# EAGLE board SGP40 Breakout-Panel (EAGLE 9.6.2), part 1 of 4
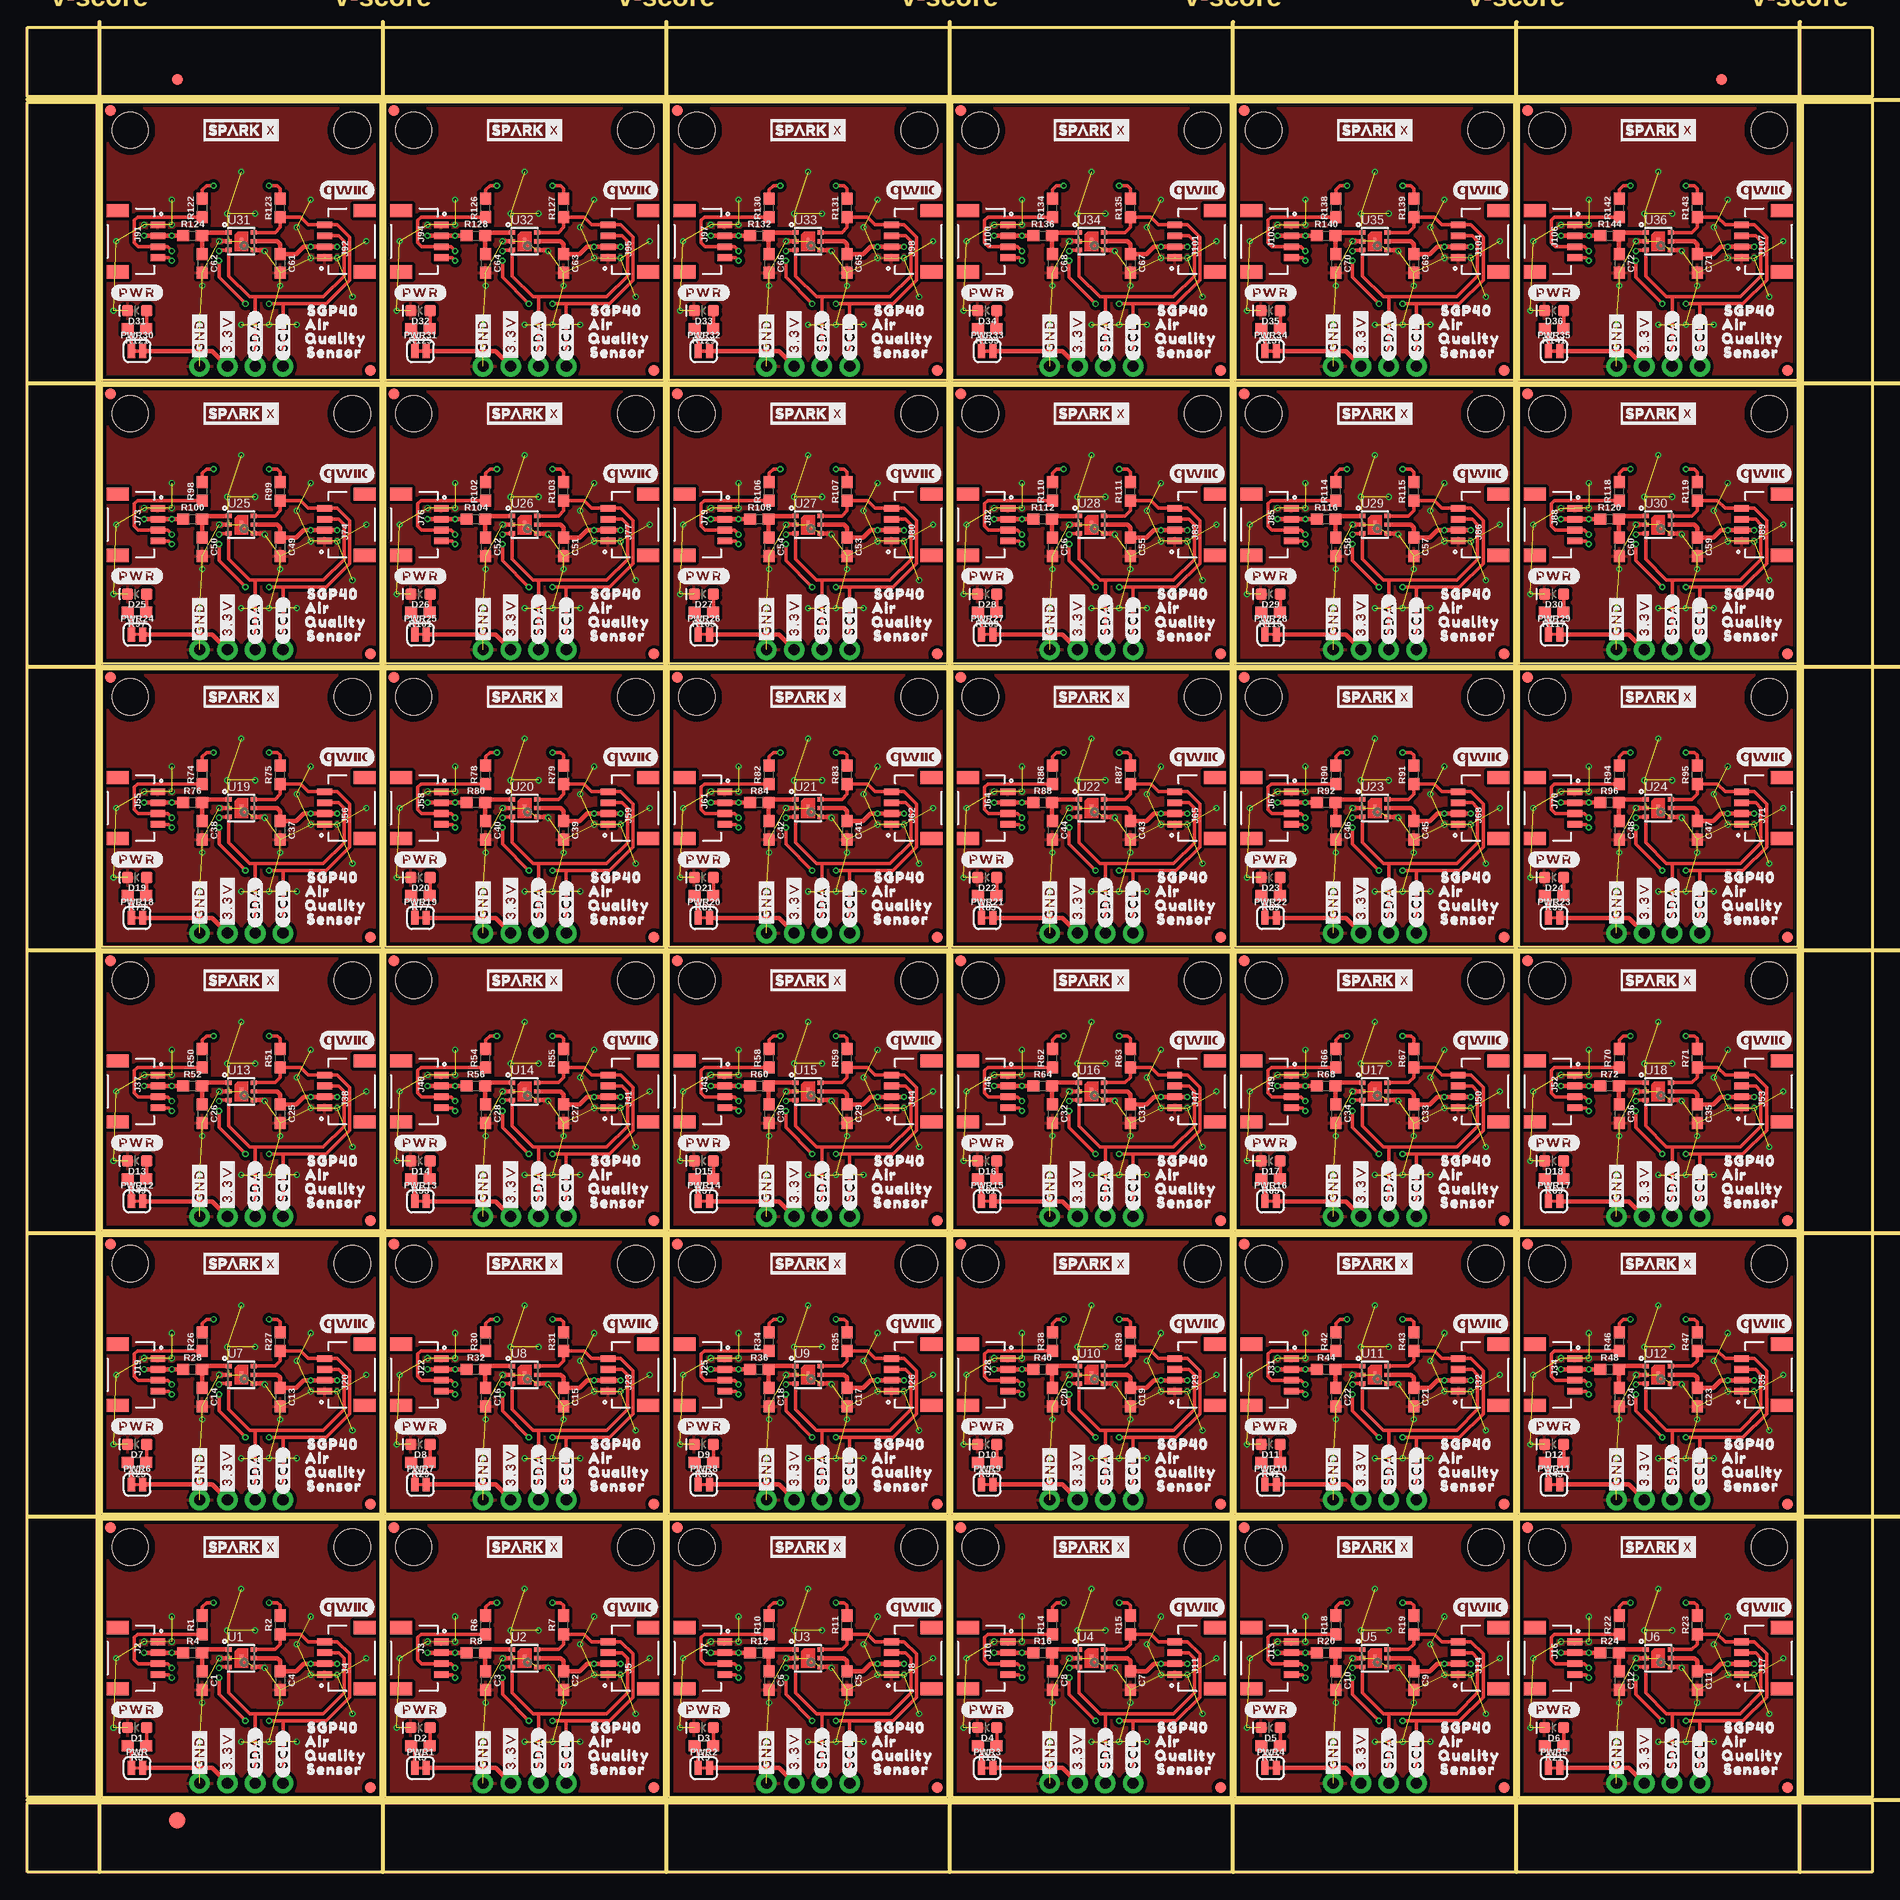
[diagram p0: board, top side]
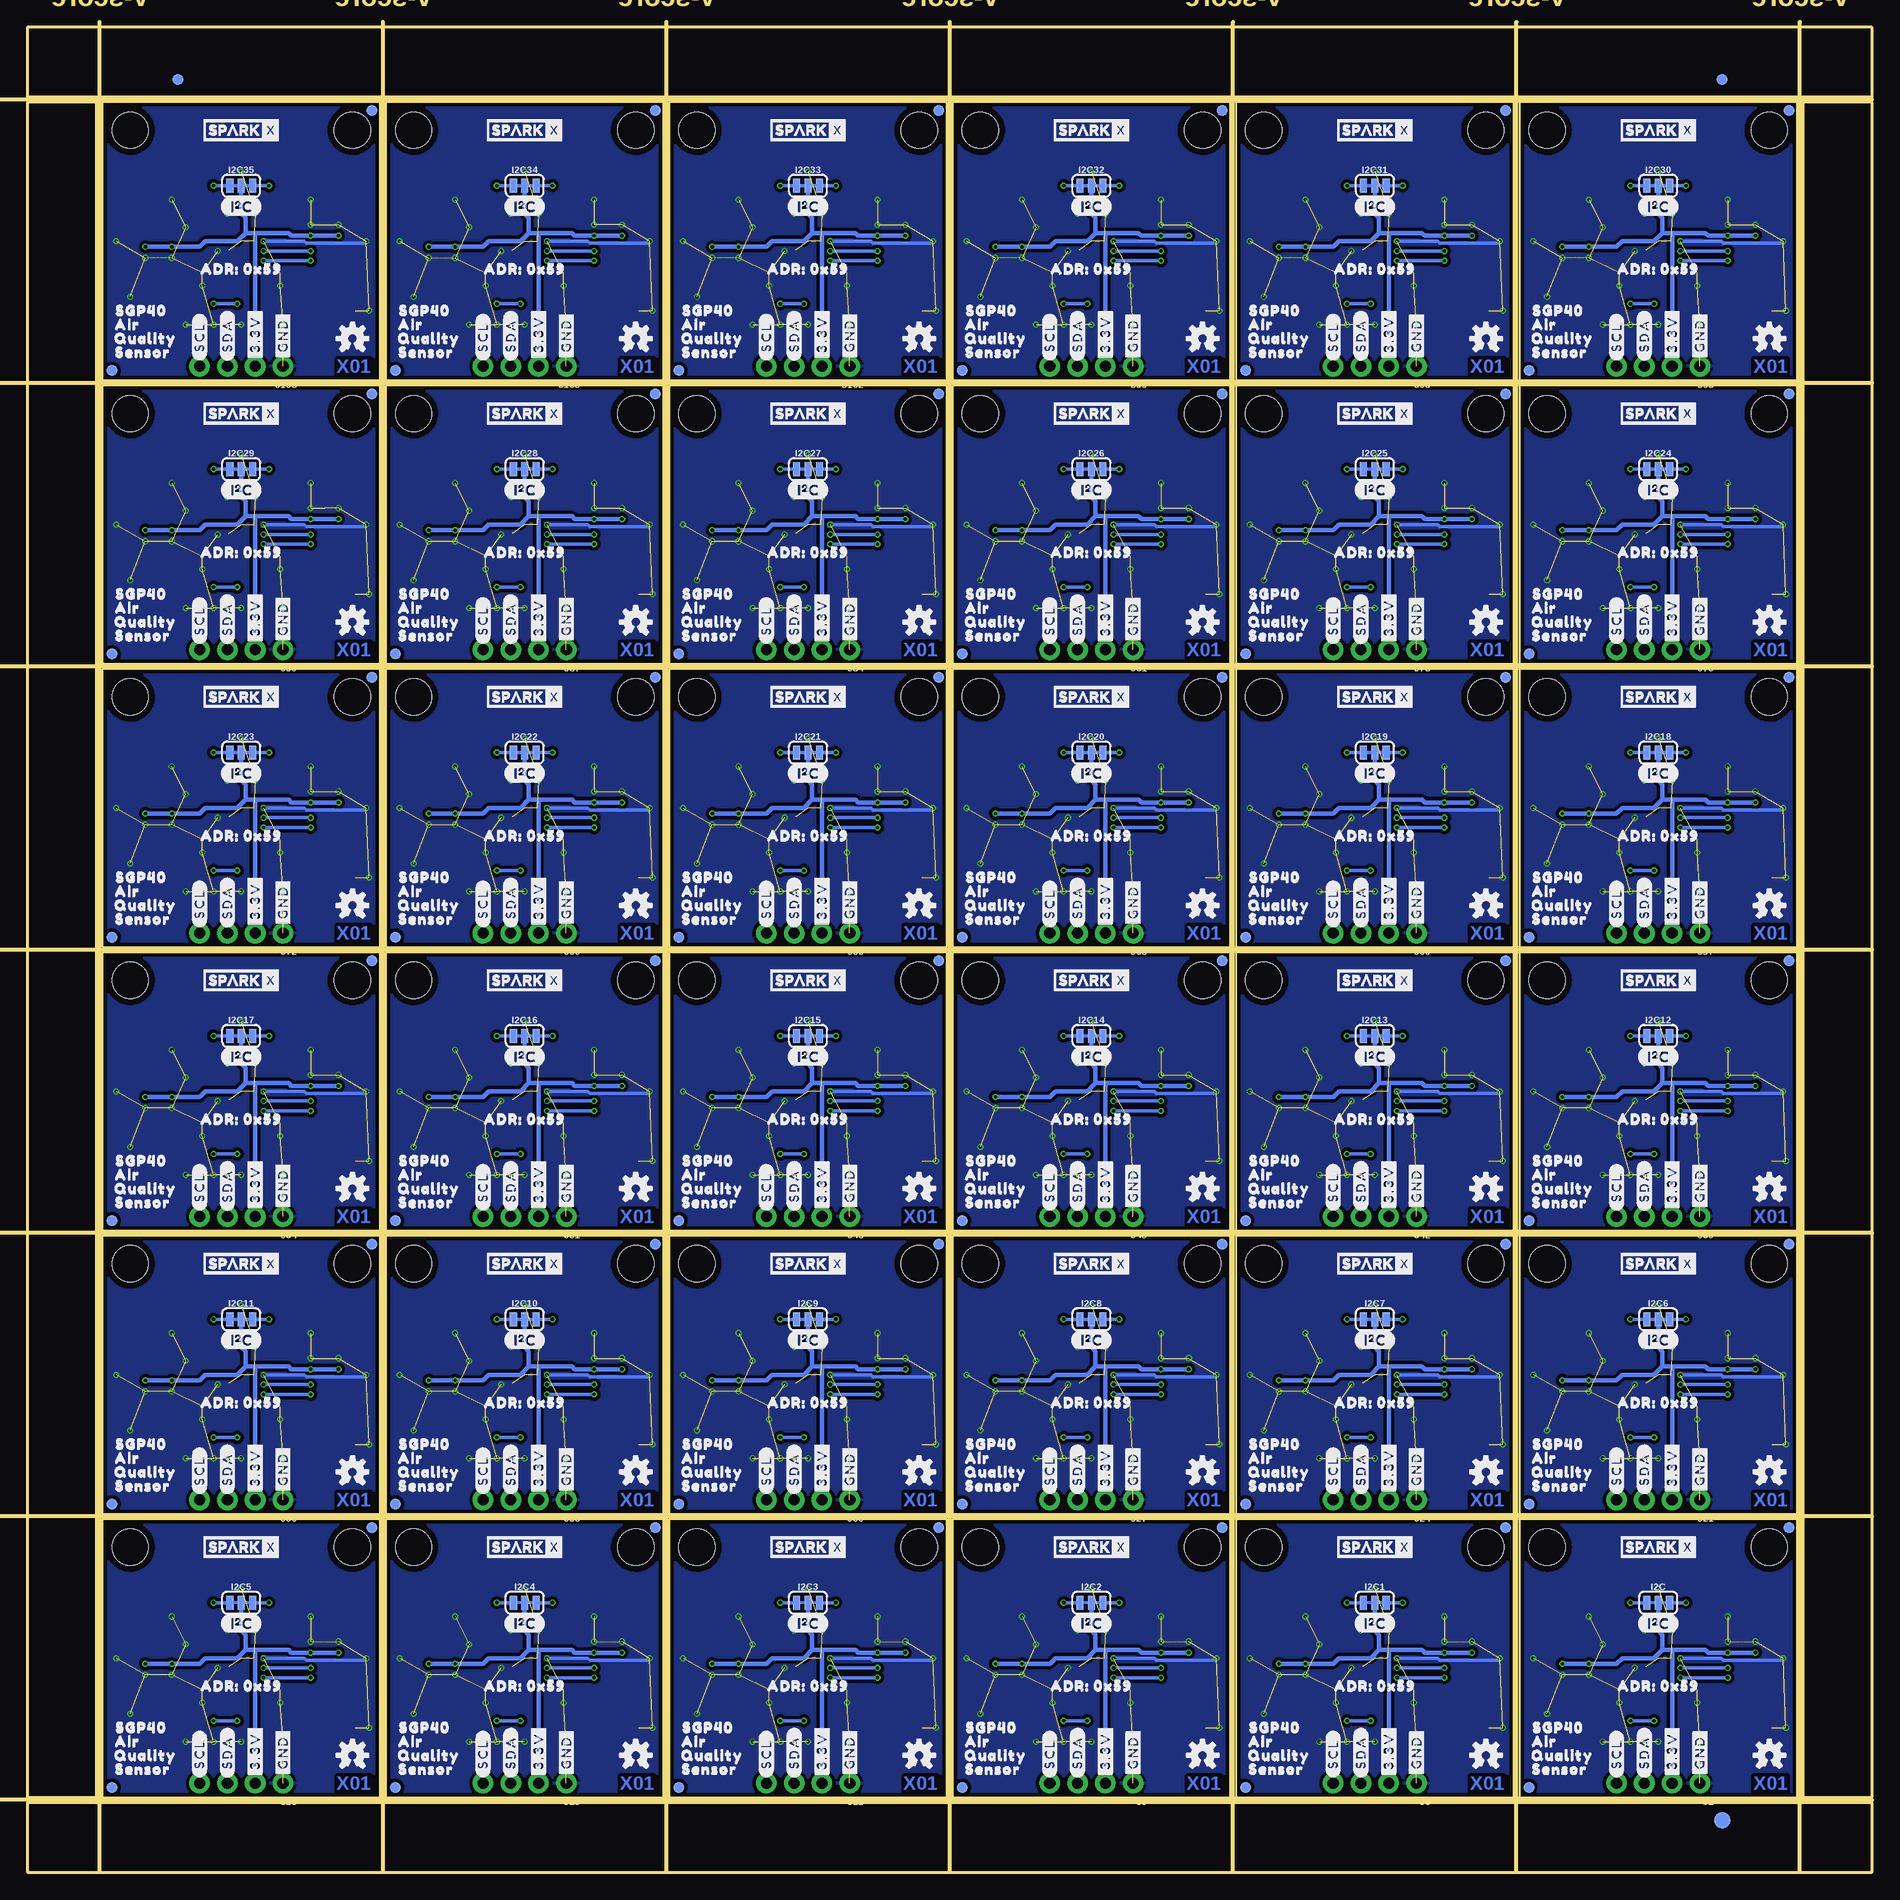
[diagram p1: board, bottom side, seen from below]

Size 168.66 x 168.66 mm. Coordinates in mm from the lower left corner, seen from the top.
Outline: 6.86,6.86 6.86,32.26 32.26,32.26 32.26,6.86 6.86,6.86
Outline: 32.77,6.86 32.77,32.26 58.17,32.26 58.17,6.86 32.77,6.86
Outline: 58.67,6.86 58.67,32.26 84.07,32.26 84.07,6.86 58.67,6.86
Outline: 84.58,6.86 84.58,32.26 109.98,32.26 109.98,6.86 84.58,6.86
Outline: 110.49,6.86 110.49,32.26 135.89,32.26 135.89,6.86 110.49,6.86
Outline: 136.4,6.86 136.4,32.26 161.8,32.26 161.8,6.86 136.4,6.86
Outline: 6.86,32.77 6.86,58.17 32.26,58.17 32.26,32.77 6.86,32.77
Outline: 32.77,32.77 32.77,58.17 58.17,58.17 58.17,32.77 32.77,32.77
Outline: 58.67,32.77 58.67,58.17 84.07,58.17 84.07,32.77 58.67,32.77
Outline: 84.58,32.77 84.58,58.17 109.98,58.17 109.98,32.77 84.58,32.77
Outline: 110.49,32.77 110.49,58.17 135.89,58.17 135.89,32.77 110.49,32.77
Outline: 136.4,32.77 136.4,58.17 161.8,58.17 161.8,32.77 136.4,32.77
Outline: 6.86,58.67 6.86,84.07 32.26,84.07 32.26,58.67 6.86,58.67
Outline: 32.77,58.67 32.77,84.07 58.17,84.07 58.17,58.67 32.77,58.67
Outline: 58.67,58.67 58.67,84.07 84.07,84.07 84.07,58.67 58.67,58.67
Outline: 84.58,58.67 84.58,84.07 109.98,84.07 109.98,58.67 84.58,58.67
Outline: 110.49,58.67 110.49,84.07 135.89,84.07 135.89,58.67 110.49,58.67
Outline: 136.4,58.67 136.4,84.07 161.8,84.07 161.8,58.67 136.4,58.67
Outline: 6.86,84.58 6.86,109.98 32.26,109.98 32.26,84.58 6.86,84.58
Outline: 32.77,84.58 32.77,109.98 58.17,109.98 58.17,84.58 32.77,84.58
Outline: 58.67,84.58 58.67,109.98 84.07,109.98 84.07,84.58 58.67,84.58
Outline: 84.58,84.58 84.58,109.98 109.98,109.98 109.98,84.58 84.58,84.58
Outline: 110.49,84.58 110.49,109.98 135.89,109.98 135.89,84.58 110.49,84.58
Outline: 136.4,84.58 136.4,109.98 161.8,109.98 161.8,84.58 136.4,84.58
Outline: 6.86,110.49 6.86,135.89 32.26,135.89 32.26,110.49 6.86,110.49
Outline: 32.77,110.49 32.77,135.89 58.17,135.89 58.17,110.49 32.77,110.49
Outline: 58.67,110.49 58.67,135.89 84.07,135.89 84.07,110.49 58.67,110.49
Outline: 84.58,110.49 84.58,135.89 109.98,135.89 109.98,110.49 84.58,110.49
Outline: 110.49,110.49 110.49,135.89 135.89,135.89 135.89,110.49 110.49,110.49
Outline: 136.4,110.49 136.4,135.89 161.8,135.89 161.8,110.49 136.4,110.49
Outline: 6.86,136.4 6.86,161.8 32.26,161.8 32.26,136.4 6.86,136.4
Outline: 32.77,136.4 32.77,161.8 58.17,161.8 58.17,136.4 32.77,136.4
Outline: 58.67,136.4 58.67,161.8 84.07,161.8 84.07,136.4 58.67,136.4
Outline: 84.58,136.4 84.58,161.8 109.98,161.8 109.98,136.4 84.58,136.4
Outline: 110.49,136.4 110.49,161.8 135.89,161.8 135.89,136.4 110.49,136.4
Outline: 136.4,136.4 136.4,161.8 161.8,161.8 161.8,136.4 136.4,136.4
Outline: 0,6.35 168.66,6.35 168.66,0 0,0 0,6.35
Outline: 162.31,161.8 168.66,161.8 168.66,6.86 162.31,6.86 162.31,161.8
Outline: 0,168.66 168.66,168.66 168.66,162.31 0,162.31 0,168.66
Outline: 0,161.8 6.35,161.8 6.35,6.86 0,6.86 0,161.8
Copper layers (1*16): Top 0.035mm / dielectric 1.5mm / Bottom 0.035mm
Design rules "SGP40 Breakout": minimum track width 5mil, minimum drill 0.3mm, track to track 5mil, track to pad 5mil, pad to pad 5mil, via to via 5mil, smd to smd 5mil, copper to edge 7mil, drill to drill 7mil, minimum pad ring 5mil, minimum via ring 5mil, stop-mask expansion 2.5mil, vias tented up to drill 25mil, thermal gap 10mil
Milling: 14 lines

## Footprints (pad centres in the part's own frame; a part is rotated, then mirrored left to right if it is on the bottom)
0603 = smd 1.1 x 1: 1 -0.85,0; 2 0.85,0
LED-0603 = smd 1 x 1: A -0.877,0; C 0.877,0
FIDUCIAL-1X2 = smd 1 x 1: 1 0,0
FIDUCIAL-1.5X3 = smd 1.5 x 1.5: 1 0,0
SMT-JUMPER_3_2-NC_TRACE_SILK = smd 0.66 x 1.27: 1 -1.041,0; 2 0,0; 3 1.041,0
1X04_NO_SILK = drill 1.016 pad 1.88: 1 0,0; 2 2.54,0; 3 5.08,0; 4 7.62,0
JST04_1MM_RA = smd 0.6 x 1.35: 1 -1.5,0; 2 -0.5,0; 3 0.5,0; 4 1.5,0 | smd 1.2 x 2: NC1 2.8,-3.675; NC2 -2.8,-3.675
STAND-OFF = hole 3.302: 0,0
SMT-JUMPER_2_NC_TRACE_SILK = smd 0.66 x 1.27: 1 -0.521,0; 2 0.521,0
SGP40 = smd 0.55 x 0.4: 1 -1.15,0.8; 2 -1.15,0; 3 -1.15,-0.8; 4 1.15,-0.8; 5 1.15,0; 6 1.15,0.8 | smd 0.305 x 0.61: DIEPAD 0,0

## Placement (x,y rotation side)
C1  1.0uF  [0603]  16,17.53 270 top
C2  1.0uF  [0603]  49.02,17.53 270 top
C3  1.0uF  [0603]  41.91,17.53 270 top
C4  1.0uF  [0603]  23.11,17.53 270 top
C5  1.0uF  [0603]  74.93,17.53 270 top
C6  1.0uF  [0603]  67.82,17.53 270 top
C7  1.0uF  [0603]  100.84,17.53 270 top
C8  1.0uF  [0603]  93.73,17.53 270 top
C9  1.0uF  [0603]  126.75,17.53 270 top
C10  1.0uF  [0603]  119.63,17.53 270 top
C11  1.0uF  [0603]  152.65,17.53 270 top
C12  1.0uF  [0603]  145.54,17.53 270 top
C13  1.0uF  [0603]  23.11,43.43 270 top
C14  1.0uF  [0603]  16,43.43 270 top
C15  1.0uF  [0603]  49.02,43.43 270 top
C16  1.0uF  [0603]  41.91,43.43 270 top
C17  1.0uF  [0603]  74.93,43.43 270 top
C18  1.0uF  [0603]  67.82,43.43 270 top
C19  1.0uF  [0603]  100.84,43.43 270 top
C20  1.0uF  [0603]  93.73,43.43 270 top
C21  1.0uF  [0603]  126.75,43.43 270 top
C22  1.0uF  [0603]  119.63,43.43 270 top
C23  1.0uF  [0603]  152.65,43.43 270 top
C24  1.0uF  [0603]  145.54,43.43 270 top
C25  1.0uF  [0603]  23.11,69.34 270 top
C26  1.0uF  [0603]  16,69.34 270 top
C27  1.0uF  [0603]  49.02,69.34 270 top
C28  1.0uF  [0603]  41.91,69.34 270 top
C29  1.0uF  [0603]  74.93,69.34 270 top
C30  1.0uF  [0603]  67.82,69.34 270 top
C31  1.0uF  [0603]  100.84,69.34 270 top
C32  1.0uF  [0603]  93.73,69.34 270 top
C33  1.0uF  [0603]  126.75,69.34 270 top
C34  1.0uF  [0603]  119.63,69.34 270 top
C35  1.0uF  [0603]  152.65,69.34 270 top
C36  1.0uF  [0603]  145.54,69.34 270 top
C37  1.0uF  [0603]  23.11,95.25 270 top
C38  1.0uF  [0603]  16,95.25 270 top
C39  1.0uF  [0603]  49.02,95.25 270 top
C40  1.0uF  [0603]  41.91,95.25 270 top
C41  1.0uF  [0603]  74.93,95.25 270 top
C42  1.0uF  [0603]  67.82,95.25 270 top
C43  1.0uF  [0603]  100.84,95.25 270 top
C44  1.0uF  [0603]  93.73,95.25 270 top
C45  1.0uF  [0603]  126.75,95.25 270 top
C46  1.0uF  [0603]  119.63,95.25 270 top
C47  1.0uF  [0603]  152.65,95.25 270 top
C48  1.0uF  [0603]  145.54,95.25 270 top
C49  1.0uF  [0603]  23.11,121.16 270 top
C50  1.0uF  [0603]  16,121.16 270 top
C51  1.0uF  [0603]  49.02,121.16 270 top
C52  1.0uF  [0603]  41.91,121.16 270 top
C53  1.0uF  [0603]  74.93,121.16 270 top
C54  1.0uF  [0603]  67.82,121.16 270 top
C55  1.0uF  [0603]  100.84,121.16 270 top
C56  1.0uF  [0603]  93.73,121.16 270 top
C57  1.0uF  [0603]  126.75,121.16 270 top
C58  1.0uF  [0603]  119.63,121.16 270 top
C59  1.0uF  [0603]  152.65,121.16 270 top
C60  1.0uF  [0603]  145.54,121.16 270 top
C61  1.0uF  [0603]  23.11,147.07 270 top
C62  1.0uF  [0603]  16,147.07 270 top
C63  1.0uF  [0603]  49.02,147.07 270 top
C64  1.0uF  [0603]  41.91,147.07 270 top
C65  1.0uF  [0603]  74.93,147.07 270 top
C66  1.0uF  [0603]  67.82,147.07 270 top
C67  1.0uF  [0603]  100.84,147.07 270 top
C68  1.0uF  [0603]  93.73,147.07 270 top
C69  1.0uF  [0603]  126.75,147.07 270 top
C70  1.0uF  [0603]  119.63,147.07 270 top
C71  1.0uF  [0603]  152.65,147.07 270 top
C72  1.0uF  [0603]  145.54,147.07 270 top
D1  RED  [LED-0603]  10.03,13.21 180 top
D2  RED  [LED-0603]  35.94,13.21 180 top
D3  RED  [LED-0603]  61.85,13.21 180 top
D4  RED  [LED-0603]  87.76,13.21 180 top
D5  RED  [LED-0603]  113.67,13.21 180 top
D6  RED  [LED-0603]  139.57,13.21 180 top
D7  RED  [LED-0603]  10.03,39.12 180 top
D8  RED  [LED-0603]  35.94,39.12 180 top
D9  RED  [LED-0603]  61.85,39.12 180 top
D10  RED  [LED-0603]  87.76,39.12 180 top
D11  RED  [LED-0603]  113.67,39.12 180 top
D12  RED  [LED-0603]  139.57,39.12 180 top
D13  RED  [LED-0603]  10.03,65.02 180 top
D14  RED  [LED-0603]  35.94,65.02 180 top
D15  RED  [LED-0603]  61.85,65.02 180 top
D16  RED  [LED-0603]  87.76,65.02 180 top
D17  RED  [LED-0603]  113.67,65.02 180 top
D18  RED  [LED-0603]  139.57,65.02 180 top
D19  RED  [LED-0603]  10.03,90.93 180 top
D20  RED  [LED-0603]  35.94,90.93 180 top
D21  RED  [LED-0603]  61.85,90.93 180 top
D22  RED  [LED-0603]  87.76,90.93 180 top
D23  RED  [LED-0603]  113.67,90.93 180 top
D24  RED  [LED-0603]  139.57,90.93 180 top
D25  RED  [LED-0603]  10.03,116.84 180 top
D26  RED  [LED-0603]  35.94,116.84 180 top
D27  RED  [LED-0603]  61.85,116.84 180 top
D28  RED  [LED-0603]  87.76,116.84 180 top
D29  RED  [LED-0603]  113.67,116.84 180 top
D30  RED  [LED-0603]  139.57,116.84 180 top
D31  RED  [LED-0603]  10.03,142.75 180 top
D32  RED  [LED-0603]  35.94,142.75 180 top
D33  RED  [LED-0603]  61.85,142.75 180 top
D34  RED  [LED-0603]  87.76,142.75 180 top
D35  RED  [LED-0603]  113.67,142.75 180 top
D36  RED  [LED-0603]  139.57,142.75 180 top
E$1  [FIDUCIAL-1X2]  13.72,163.89 0 top
E$2  [FIDUCIAL-1X2]  13.72,163.89 0 bottom
E$3  [FIDUCIAL-1X2]  154.88,163.89 0 top
E$4  [FIDUCIAL-1X2]  154.88,163.89 0 bottom
E$5  [FIDUCIAL-1.5X3]  13.72,4.76 0 top
E$6  [FIDUCIAL-1.5X3]  13.72,4.76 0 bottom
I2C  JUMPER-SMT_3_2-NC_TRACE_SILK  [SMT-JUMPER_3_2-NC_TRACE_SILK]  19.56,24.64 0 bottom
I2C1  JUMPER-SMT_3_2-NC_TRACE_SILK  [SMT-JUMPER_3_2-NC_TRACE_SILK]  45.47,24.64 0 bottom
I2C2  JUMPER-SMT_3_2-NC_TRACE_SILK  [SMT-JUMPER_3_2-NC_TRACE_SILK]  71.37,24.64 0 bottom
I2C3  JUMPER-SMT_3_2-NC_TRACE_SILK  [SMT-JUMPER_3_2-NC_TRACE_SILK]  97.28,24.64 0 bottom
I2C4  JUMPER-SMT_3_2-NC_TRACE_SILK  [SMT-JUMPER_3_2-NC_TRACE_SILK]  123.19,24.64 0 bottom
I2C5  JUMPER-SMT_3_2-NC_TRACE_SILK  [SMT-JUMPER_3_2-NC_TRACE_SILK]  149.1,24.64 0 bottom
I2C6  JUMPER-SMT_3_2-NC_TRACE_SILK  [SMT-JUMPER_3_2-NC_TRACE_SILK]  19.56,50.55 0 bottom
I2C7  JUMPER-SMT_3_2-NC_TRACE_SILK  [SMT-JUMPER_3_2-NC_TRACE_SILK]  45.47,50.55 0 bottom
I2C8  JUMPER-SMT_3_2-NC_TRACE_SILK  [SMT-JUMPER_3_2-NC_TRACE_SILK]  71.37,50.55 0 bottom
I2C9  JUMPER-SMT_3_2-NC_TRACE_SILK  [SMT-JUMPER_3_2-NC_TRACE_SILK]  97.28,50.55 0 bottom
I2C10  JUMPER-SMT_3_2-NC_TRACE_SILK  [SMT-JUMPER_3_2-NC_TRACE_SILK]  123.19,50.55 0 bottom
I2C11  JUMPER-SMT_3_2-NC_TRACE_SILK  [SMT-JUMPER_3_2-NC_TRACE_SILK]  149.1,50.55 0 bottom
I2C12  JUMPER-SMT_3_2-NC_TRACE_SILK  [SMT-JUMPER_3_2-NC_TRACE_SILK]  19.56,76.45 0 bottom
I2C13  JUMPER-SMT_3_2-NC_TRACE_SILK  [SMT-JUMPER_3_2-NC_TRACE_SILK]  45.47,76.45 0 bottom
I2C14  JUMPER-SMT_3_2-NC_TRACE_SILK  [SMT-JUMPER_3_2-NC_TRACE_SILK]  71.37,76.45 0 bottom
I2C15  JUMPER-SMT_3_2-NC_TRACE_SILK  [SMT-JUMPER_3_2-NC_TRACE_SILK]  97.28,76.45 0 bottom
I2C16  JUMPER-SMT_3_2-NC_TRACE_SILK  [SMT-JUMPER_3_2-NC_TRACE_SILK]  123.19,76.45 0 bottom
I2C17  JUMPER-SMT_3_2-NC_TRACE_SILK  [SMT-JUMPER_3_2-NC_TRACE_SILK]  149.1,76.45 0 bottom
I2C18  JUMPER-SMT_3_2-NC_TRACE_SILK  [SMT-JUMPER_3_2-NC_TRACE_SILK]  19.56,102.36 0 bottom
I2C19  JUMPER-SMT_3_2-NC_TRACE_SILK  [SMT-JUMPER_3_2-NC_TRACE_SILK]  45.47,102.36 0 bottom
I2C20  JUMPER-SMT_3_2-NC_TRACE_SILK  [SMT-JUMPER_3_2-NC_TRACE_SILK]  71.37,102.36 0 bottom
I2C21  JUMPER-SMT_3_2-NC_TRACE_SILK  [SMT-JUMPER_3_2-NC_TRACE_SILK]  97.28,102.36 0 bottom
I2C22  JUMPER-SMT_3_2-NC_TRACE_SILK  [SMT-JUMPER_3_2-NC_TRACE_SILK]  123.19,102.36 0 bottom
I2C23  JUMPER-SMT_3_2-NC_TRACE_SILK  [SMT-JUMPER_3_2-NC_TRACE_SILK]  149.1,102.36 0 bottom
I2C24  JUMPER-SMT_3_2-NC_TRACE_SILK  [SMT-JUMPER_3_2-NC_TRACE_SILK]  19.56,128.27 0 bottom
I2C25  JUMPER-SMT_3_2-NC_TRACE_SILK  [SMT-JUMPER_3_2-NC_TRACE_SILK]  45.47,128.27 0 bottom
I2C26  JUMPER-SMT_3_2-NC_TRACE_SILK  [SMT-JUMPER_3_2-NC_TRACE_SILK]  71.37,128.27 0 bottom
I2C27  JUMPER-SMT_3_2-NC_TRACE_SILK  [SMT-JUMPER_3_2-NC_TRACE_SILK]  97.28,128.27 0 bottom
I2C28  JUMPER-SMT_3_2-NC_TRACE_SILK  [SMT-JUMPER_3_2-NC_TRACE_SILK]  123.19,128.27 0 bottom
I2C29  JUMPER-SMT_3_2-NC_TRACE_SILK  [SMT-JUMPER_3_2-NC_TRACE_SILK]  149.1,128.27 0 bottom
I2C30  JUMPER-SMT_3_2-NC_TRACE_SILK  [SMT-JUMPER_3_2-NC_TRACE_SILK]  19.56,154.18 0 bottom
I2C31  JUMPER-SMT_3_2-NC_TRACE_SILK  [SMT-JUMPER_3_2-NC_TRACE_SILK]  45.47,154.18 0 bottom
I2C32  JUMPER-SMT_3_2-NC_TRACE_SILK  [SMT-JUMPER_3_2-NC_TRACE_SILK]  71.37,154.18 0 bottom
I2C33  JUMPER-SMT_3_2-NC_TRACE_SILK  [SMT-JUMPER_3_2-NC_TRACE_SILK]  97.28,154.18 0 bottom
I2C34  JUMPER-SMT_3_2-NC_TRACE_SILK  [SMT-JUMPER_3_2-NC_TRACE_SILK]  123.19,154.18 0 bottom
I2C35  JUMPER-SMT_3_2-NC_TRACE_SILK  [SMT-JUMPER_3_2-NC_TRACE_SILK]  149.1,154.18 0 bottom
J1  [1X04_NO_SILK]  15.75,8.13 180 bottom
J2  QWIIC_RIGHT_ANGLE  [JST04_1MM_RA]  11.94,19.56 270 top
J3  QWIIC_RIGHT_ANGLE  [JST04_1MM_RA]  37.85,19.56 270 top
J4  QWIIC_RIGHT_ANGLE  [JST04_1MM_RA]  27.18,19.56 90 top
J5  QWIIC_RIGHT_ANGLE  [JST04_1MM_RA]  53.09,19.56 90 top
J6  [1X04_NO_SILK]  41.66,8.13 180 bottom
J7  QWIIC_RIGHT_ANGLE  [JST04_1MM_RA]  63.75,19.56 270 top
J8  QWIIC_RIGHT_ANGLE  [JST04_1MM_RA]  78.99,19.56 90 top
J9  [1X04_NO_SILK]  67.56,8.13 180 bottom
J10  QWIIC_RIGHT_ANGLE  [JST04_1MM_RA]  89.66,19.56 270 top
J11  QWIIC_RIGHT_ANGLE  [JST04_1MM_RA]  104.9,19.56 90 top
J12  [1X04_NO_SILK]  93.47,8.13 180 bottom
J13  QWIIC_RIGHT_ANGLE  [JST04_1MM_RA]  115.57,19.56 270 top
J14  QWIIC_RIGHT_ANGLE  [JST04_1MM_RA]  130.81,19.56 90 top
J15  [1X04_NO_SILK]  119.38,8.13 180 bottom
J16  QWIIC_RIGHT_ANGLE  [JST04_1MM_RA]  141.48,19.56 270 top
J17  QWIIC_RIGHT_ANGLE  [JST04_1MM_RA]  156.72,19.56 90 top
J18  [1X04_NO_SILK]  145.29,8.13 180 bottom
J19  QWIIC_RIGHT_ANGLE  [JST04_1MM_RA]  11.94,45.47 270 top
J20  QWIIC_RIGHT_ANGLE  [JST04_1MM_RA]  27.18,45.47 90 top
J21  [1X04_NO_SILK]  15.75,34.04 180 bottom
J22  QWIIC_RIGHT_ANGLE  [JST04_1MM_RA]  37.85,45.47 270 top
J23  QWIIC_RIGHT_ANGLE  [JST04_1MM_RA]  53.09,45.47 90 top
J24  [1X04_NO_SILK]  41.66,34.04 180 bottom
J25  QWIIC_RIGHT_ANGLE  [JST04_1MM_RA]  63.75,45.47 270 top
J26  QWIIC_RIGHT_ANGLE  [JST04_1MM_RA]  78.99,45.47 90 top
J27  [1X04_NO_SILK]  67.56,34.04 180 bottom
J28  QWIIC_RIGHT_ANGLE  [JST04_1MM_RA]  89.66,45.47 270 top
J29  QWIIC_RIGHT_ANGLE  [JST04_1MM_RA]  104.9,45.47 90 top
J30  [1X04_NO_SILK]  93.47,34.04 180 bottom
J31  QWIIC_RIGHT_ANGLE  [JST04_1MM_RA]  115.57,45.47 270 top
J32  QWIIC_RIGHT_ANGLE  [JST04_1MM_RA]  130.81,45.47 90 top
J33  [1X04_NO_SILK]  119.38,34.04 180 bottom
J34  QWIIC_RIGHT_ANGLE  [JST04_1MM_RA]  141.48,45.47 270 top
J35  QWIIC_RIGHT_ANGLE  [JST04_1MM_RA]  156.72,45.47 90 top
J36  [1X04_NO_SILK]  145.29,34.04 180 bottom
J37  QWIIC_RIGHT_ANGLE  [JST04_1MM_RA]  11.94,71.37 270 top
J38  QWIIC_RIGHT_ANGLE  [JST04_1MM_RA]  27.18,71.37 90 top
J39  [1X04_NO_SILK]  15.75,59.94 180 bottom
J40  QWIIC_RIGHT_ANGLE  [JST04_1MM_RA]  37.85,71.37 270 top
J41  QWIIC_RIGHT_ANGLE  [JST04_1MM_RA]  53.09,71.37 90 top
J42  [1X04_NO_SILK]  41.66,59.94 180 bottom
J43  QWIIC_RIGHT_ANGLE  [JST04_1MM_RA]  63.75,71.37 270 top
J44  QWIIC_RIGHT_ANGLE  [JST04_1MM_RA]  78.99,71.37 90 top
J45  [1X04_NO_SILK]  67.56,59.94 180 bottom
J46  QWIIC_RIGHT_ANGLE  [JST04_1MM_RA]  89.66,71.37 270 top
J47  QWIIC_RIGHT_ANGLE  [JST04_1MM_RA]  104.9,71.37 90 top
J48  [1X04_NO_SILK]  93.47,59.94 180 bottom
J49  QWIIC_RIGHT_ANGLE  [JST04_1MM_RA]  115.57,71.37 270 top
J50  QWIIC_RIGHT_ANGLE  [JST04_1MM_RA]  130.81,71.37 90 top
J51  [1X04_NO_SILK]  119.38,59.94 180 bottom
J52  QWIIC_RIGHT_ANGLE  [JST04_1MM_RA]  141.48,71.37 270 top
J53  QWIIC_RIGHT_ANGLE  [JST04_1MM_RA]  156.72,71.37 90 top
J54  [1X04_NO_SILK]  145.29,59.94 180 bottom
J55  QWIIC_RIGHT_ANGLE  [JST04_1MM_RA]  11.94,97.28 270 top
J56  QWIIC_RIGHT_ANGLE  [JST04_1MM_RA]  27.18,97.28 90 top
J57  [1X04_NO_SILK]  15.75,85.85 180 bottom
J58  QWIIC_RIGHT_ANGLE  [JST04_1MM_RA]  37.85,97.28 270 top
J59  QWIIC_RIGHT_ANGLE  [JST04_1MM_RA]  53.09,97.28 90 top
J60  [1X04_NO_SILK]  41.66,85.85 180 bottom
J61  QWIIC_RIGHT_ANGLE  [JST04_1MM_RA]  63.75,97.28 270 top
J62  QWIIC_RIGHT_ANGLE  [JST04_1MM_RA]  78.99,97.28 90 top
J63  [1X04_NO_SILK]  67.56,85.85 180 bottom
J64  QWIIC_RIGHT_ANGLE  [JST04_1MM_RA]  89.66,97.28 270 top
J65  QWIIC_RIGHT_ANGLE  [JST04_1MM_RA]  104.9,97.28 90 top
J66  [1X04_NO_SILK]  93.47,85.85 180 bottom
J67  QWIIC_RIGHT_ANGLE  [JST04_1MM_RA]  115.57,97.28 270 top
J68  QWIIC_RIGHT_ANGLE  [JST04_1MM_RA]  130.81,97.28 90 top
J69  [1X04_NO_SILK]  119.38,85.85 180 bottom
J70  QWIIC_RIGHT_ANGLE  [JST04_1MM_RA]  141.48,97.28 270 top
J71  QWIIC_RIGHT_ANGLE  [JST04_1MM_RA]  156.72,97.28 90 top
J72  [1X04_NO_SILK]  145.29,85.85 180 bottom
J73  QWIIC_RIGHT_ANGLE  [JST04_1MM_RA]  11.94,123.19 270 top
J74  QWIIC_RIGHT_ANGLE  [JST04_1MM_RA]  27.18,123.19 90 top
J75  [1X04_NO_SILK]  15.75,111.76 180 bottom
J76  QWIIC_RIGHT_ANGLE  [JST04_1MM_RA]  37.85,123.19 270 top
J77  QWIIC_RIGHT_ANGLE  [JST04_1MM_RA]  53.09,123.19 90 top
J78  [1X04_NO_SILK]  41.66,111.76 180 bottom
J79  QWIIC_RIGHT_ANGLE  [JST04_1MM_RA]  63.75,123.19 270 top
J80  QWIIC_RIGHT_ANGLE  [JST04_1MM_RA]  78.99,123.19 90 top
J81  [1X04_NO_SILK]  67.56,111.76 180 bottom
J82  QWIIC_RIGHT_ANGLE  [JST04_1MM_RA]  89.66,123.19 270 top
J83  QWIIC_RIGHT_ANGLE  [JST04_1MM_RA]  104.9,123.19 90 top
J84  [1X04_NO_SILK]  93.47,111.76 180 bottom
J85  QWIIC_RIGHT_ANGLE  [JST04_1MM_RA]  115.57,123.19 270 top
J86  QWIIC_RIGHT_ANGLE  [JST04_1MM_RA]  130.81,123.19 90 top
J87  [1X04_NO_SILK]  119.38,111.76 180 bottom
J88  QWIIC_RIGHT_ANGLE  [JST04_1MM_RA]  141.48,123.19 270 top
J89  QWIIC_RIGHT_ANGLE  [JST04_1MM_RA]  156.72,123.19 90 top
J90  [1X04_NO_SILK]  145.29,111.76 180 bottom
J91  QWIIC_RIGHT_ANGLE  [JST04_1MM_RA]  11.94,149.1 270 top
J92  QWIIC_RIGHT_ANGLE  [JST04_1MM_RA]  27.18,149.1 90 top
J93  [1X04_NO_SILK]  15.75,137.67 180 bottom
J94  QWIIC_RIGHT_ANGLE  [JST04_1MM_RA]  37.85,149.1 270 top
J95  QWIIC_RIGHT_ANGLE  [JST04_1MM_RA]  53.09,149.1 90 top
J96  [1X04_NO_SILK]  41.66,137.67 180 bottom
J97  QWIIC_RIGHT_ANGLE  [JST04_1MM_RA]  63.75,149.1 270 top
J98  QWIIC_RIGHT_ANGLE  [JST04_1MM_RA]  78.99,149.1 90 top
J99  [1X04_NO_SILK]  67.56,137.67 180 bottom
J100  QWIIC_RIGHT_ANGLE  [JST04_1MM_RA]  89.66,149.1 270 top
J101  QWIIC_RIGHT_ANGLE  [JST04_1MM_RA]  104.9,149.1 90 top
J102  [1X04_NO_SILK]  93.47,137.67 180 bottom
J103  QWIIC_RIGHT_ANGLE  [JST04_1MM_RA]  115.57,149.1 270 top
J104  QWIIC_RIGHT_ANGLE  [JST04_1MM_RA]  130.81,149.1 90 top
J105  [1X04_NO_SILK]  119.38,137.67 180 bottom
J106  QWIIC_RIGHT_ANGLE  [JST04_1MM_RA]  141.48,149.1 270 top
J107  QWIIC_RIGHT_ANGLE  [JST04_1MM_RA]  156.72,149.1 90 top
J108  [1X04_NO_SILK]  145.29,137.67 180 bottom
JP1  FIDUCIAL1X2  [FIDUCIAL-1X2]  7.62,31.5 0 bottom
JP2  FIDUCIAL1X2  [FIDUCIAL-1X2]  31.37,7.75 0 top
JP3  STAND-OFF  [STAND-OFF]  9.4,29.72 0 top
JP4  STAND-OFF  [STAND-OFF]  29.72,29.72 0 top
JP5  FIDUCIAL1X2  [FIDUCIAL-1X2]  31.37,7.75 0 bottom
JP6  FIDUCIAL1X2  [FIDUCIAL-1X2]  7.62,31.5 0 top
JP7  STAND-OFF  [STAND-OFF]  35.31,29.72 0 top
JP8  STAND-OFF  [STAND-OFF]  55.63,29.72 0 top
JP9  FIDUCIAL1X2  [FIDUCIAL-1X2]  57.28,7.75 0 top
JP10  FIDUCIAL1X2  [FIDUCIAL-1X2]  33.53,31.5 0 top
JP11  FIDUCIAL1X2  [FIDUCIAL-1X2]  33.53,31.5 0 bottom
JP12  FIDUCIAL1X2  [FIDUCIAL-1X2]  57.28,7.75 0 bottom
JP13  STAND-OFF  [STAND-OFF]  61.21,29.72 0 top
JP14  STAND-OFF  [STAND-OFF]  81.53,29.72 0 top
JP15  FIDUCIAL1X2  [FIDUCIAL-1X2]  83.19,7.75 0 top
JP16  FIDUCIAL1X2  [FIDUCIAL-1X2]  59.44,31.5 0 top
JP17  FIDUCIAL1X2  [FIDUCIAL-1X2]  59.44,31.5 0 bottom
JP18  FIDUCIAL1X2  [FIDUCIAL-1X2]  83.19,7.75 0 bottom
JP19  STAND-OFF  [STAND-OFF]  87.12,29.72 0 top
JP20  STAND-OFF  [STAND-OFF]  107.44,29.72 0 top
JP21  FIDUCIAL1X2  [FIDUCIAL-1X2]  109.09,7.75 0 top
JP22  FIDUCIAL1X2  [FIDUCIAL-1X2]  85.34,31.5 0 top
JP23  FIDUCIAL1X2  [FIDUCIAL-1X2]  85.34,31.5 0 bottom
JP24  FIDUCIAL1X2  [FIDUCIAL-1X2]  109.09,7.75 0 bottom
JP25  STAND-OFF  [STAND-OFF]  113.03,29.72 0 top
JP26  STAND-OFF  [STAND-OFF]  133.35,29.72 0 top
JP27  FIDUCIAL1X2  [FIDUCIAL-1X2]  135,7.75 0 top
JP28  FIDUCIAL1X2  [FIDUCIAL-1X2]  111.25,31.5 0 top
JP29  FIDUCIAL1X2  [FIDUCIAL-1X2]  111.25,31.5 0 bottom
JP30  FIDUCIAL1X2  [FIDUCIAL-1X2]  135,7.75 0 bottom
JP31  STAND-OFF  [STAND-OFF]  138.94,29.72 0 top
JP32  STAND-OFF  [STAND-OFF]  159.26,29.72 0 top
JP33  FIDUCIAL1X2  [FIDUCIAL-1X2]  160.91,7.75 0 top
JP34  FIDUCIAL1X2  [FIDUCIAL-1X2]  137.16,31.5 0 top
JP35  FIDUCIAL1X2  [FIDUCIAL-1X2]  137.16,31.5 0 bottom
JP36  FIDUCIAL1X2  [FIDUCIAL-1X2]  160.91,7.75 0 bottom
JP37  STAND-OFF  [STAND-OFF]  9.4,55.63 0 top
JP38  STAND-OFF  [STAND-OFF]  29.72,55.63 0 top
JP39  FIDUCIAL1X2  [FIDUCIAL-1X2]  31.37,33.66 0 top
JP40  FIDUCIAL1X2  [FIDUCIAL-1X2]  7.62,57.4 0 top
JP41  FIDUCIAL1X2  [FIDUCIAL-1X2]  7.62,57.4 0 bottom
JP42  FIDUCIAL1X2  [FIDUCIAL-1X2]  31.37,33.66 0 bottom
JP43  STAND-OFF  [STAND-OFF]  35.31,55.63 0 top
JP44  STAND-OFF  [STAND-OFF]  55.63,55.63 0 top
JP45  FIDUCIAL1X2  [FIDUCIAL-1X2]  57.28,33.66 0 top
JP46  FIDUCIAL1X2  [FIDUCIAL-1X2]  33.53,57.4 0 top
JP47  FIDUCIAL1X2  [FIDUCIAL-1X2]  33.53,57.4 0 bottom
JP48  FIDUCIAL1X2  [FIDUCIAL-1X2]  57.28,33.66 0 bottom
JP49  STAND-OFF  [STAND-OFF]  61.21,55.63 0 top
JP50  STAND-OFF  [STAND-OFF]  81.53,55.63 0 top
JP51  FIDUCIAL1X2  [FIDUCIAL-1X2]  83.19,33.66 0 top
JP52  FIDUCIAL1X2  [FIDUCIAL-1X2]  59.44,57.4 0 top
JP53  FIDUCIAL1X2  [FIDUCIAL-1X2]  59.44,57.4 0 bottom
JP54  FIDUCIAL1X2  [FIDUCIAL-1X2]  83.19,33.66 0 bottom
JP55  STAND-OFF  [STAND-OFF]  87.12,55.63 0 top
JP56  STAND-OFF  [STAND-OFF]  107.44,55.63 0 top
JP57  FIDUCIAL1X2  [FIDUCIAL-1X2]  109.09,33.66 0 top
JP58  FIDUCIAL1X2  [FIDUCIAL-1X2]  85.34,57.4 0 top
JP59  FIDUCIAL1X2  [FIDUCIAL-1X2]  85.34,57.4 0 bottom
JP60  FIDUCIAL1X2  [FIDUCIAL-1X2]  109.09,33.66 0 bottom
JP61  STAND-OFF  [STAND-OFF]  113.03,55.63 0 top
JP62  STAND-OFF  [STAND-OFF]  133.35,55.63 0 top
JP63  FIDUCIAL1X2  [FIDUCIAL-1X2]  135,33.66 0 top
JP64  FIDUCIAL1X2  [FIDUCIAL-1X2]  111.25,57.4 0 top
JP65  FIDUCIAL1X2  [FIDUCIAL-1X2]  111.25,57.4 0 bottom
JP66  FIDUCIAL1X2  [FIDUCIAL-1X2]  135,33.66 0 bottom
JP67  STAND-OFF  [STAND-OFF]  138.94,55.63 0 top
JP68  STAND-OFF  [STAND-OFF]  159.26,55.63 0 top
JP69  FIDUCIAL1X2  [FIDUCIAL-1X2]  160.91,33.66 0 top
JP70  FIDUCIAL1X2  [FIDUCIAL-1X2]  137.16,57.4 0 top
JP71  FIDUCIAL1X2  [FIDUCIAL-1X2]  137.16,57.4 0 bottom
JP72  FIDUCIAL1X2  [FIDUCIAL-1X2]  160.91,33.66 0 bottom
JP73  STAND-OFF  [STAND-OFF]  9.4,81.53 0 top
JP74  STAND-OFF  [STAND-OFF]  29.72,81.53 0 top
JP75  FIDUCIAL1X2  [FIDUCIAL-1X2]  31.37,59.56 0 top
JP76  FIDUCIAL1X2  [FIDUCIAL-1X2]  7.62,83.31 0 top
JP77  FIDUCIAL1X2  [FIDUCIAL-1X2]  7.62,83.31 0 bottom
JP78  FIDUCIAL1X2  [FIDUCIAL-1X2]  31.37,59.56 0 bottom
JP79  STAND-OFF  [STAND-OFF]  35.31,81.53 0 top
JP80  STAND-OFF  [STAND-OFF]  55.63,81.53 0 top
JP81  FIDUCIAL1X2  [FIDUCIAL-1X2]  57.28,59.56 0 top
JP82  FIDUCIAL1X2  [FIDUCIAL-1X2]  33.53,83.31 0 top
JP83  FIDUCIAL1X2  [FIDUCIAL-1X2]  33.53,83.31 0 bottom
JP84  FIDUCIAL1X2  [FIDUCIAL-1X2]  57.28,59.56 0 bottom
JP85  STAND-OFF  [STAND-OFF]  61.21,81.53 0 top
JP86  STAND-OFF  [STAND-OFF]  81.53,81.53 0 top
JP87  FIDUCIAL1X2  [FIDUCIAL-1X2]  83.19,59.56 0 top
JP88  FIDUCIAL1X2  [FIDUCIAL-1X2]  59.44,83.31 0 top
JP89  FIDUCIAL1X2  [FIDUCIAL-1X2]  59.44,83.31 0 bottom
JP90  FIDUCIAL1X2  [FIDUCIAL-1X2]  83.19,59.56 0 bottom
JP91  STAND-OFF  [STAND-OFF]  87.12,81.53 0 top
JP92  STAND-OFF  [STAND-OFF]  107.44,81.53 0 top
JP93  FIDUCIAL1X2  [FIDUCIAL-1X2]  109.09,59.56 0 top
JP94  FIDUCIAL1X2  [FIDUCIAL-1X2]  85.34,83.31 0 top
JP95  FIDUCIAL1X2  [FIDUCIAL-1X2]  85.34,83.31 0 bottom
JP96  FIDUCIAL1X2  [FIDUCIAL-1X2]  109.09,59.56 0 bottom
JP97  STAND-OFF  [STAND-OFF]  113.03,81.53 0 top
JP98  STAND-OFF  [STAND-OFF]  133.35,81.53 0 top
JP99  FIDUCIAL1X2  [FIDUCIAL-1X2]  135,59.56 0 top
JP100  FIDUCIAL1X2  [FIDUCIAL-1X2]  111.25,83.31 0 top
JP101  FIDUCIAL1X2  [FIDUCIAL-1X2]  111.25,83.31 0 bottom
JP102  FIDUCIAL1X2  [FIDUCIAL-1X2]  135,59.56 0 bottom
JP103  STAND-OFF  [STAND-OFF]  138.94,81.53 0 top
JP104  STAND-OFF  [STAND-OFF]  159.26,81.53 0 top
JP105  FIDUCIAL1X2  [FIDUCIAL-1X2]  160.91,59.56 0 top
JP106  FIDUCIAL1X2  [FIDUCIAL-1X2]  137.16,83.31 0 top
JP107  FIDUCIAL1X2  [FIDUCIAL-1X2]  137.16,83.31 0 bottom
JP108  FIDUCIAL1X2  [FIDUCIAL-1X2]  160.91,59.56 0 bottom
JP109  STAND-OFF  [STAND-OFF]  9.4,107.44 0 top
JP110  STAND-OFF  [STAND-OFF]  29.72,107.44 0 top
JP111  FIDUCIAL1X2  [FIDUCIAL-1X2]  31.37,85.47 0 top
JP112  FIDUCIAL1X2  [FIDUCIAL-1X2]  7.62,109.22 0 top
JP113  FIDUCIAL1X2  [FIDUCIAL-1X2]  7.62,109.22 0 bottom
JP114  FIDUCIAL1X2  [FIDUCIAL-1X2]  31.37,85.47 0 bottom
JP115  STAND-OFF  [STAND-OFF]  35.31,107.44 0 top
JP116  STAND-OFF  [STAND-OFF]  55.63,107.44 0 top
JP117  FIDUCIAL1X2  [FIDUCIAL-1X2]  57.28,85.47 0 top
JP118  FIDUCIAL1X2  [FIDUCIAL-1X2]  33.53,109.22 0 top
JP119  FIDUCIAL1X2  [FIDUCIAL-1X2]  33.53,109.22 0 bottom
JP120  FIDUCIAL1X2  [FIDUCIAL-1X2]  57.28,85.47 0 bottom
JP121  STAND-OFF  [STAND-OFF]  61.21,107.44 0 top
JP122  STAND-OFF  [STAND-OFF]  81.53,107.44 0 top
JP123  FIDUCIAL1X2  [FIDUCIAL-1X2]  83.19,85.47 0 top
JP124  FIDUCIAL1X2  [FIDUCIAL-1X2]  59.44,109.22 0 top
JP125  FIDUCIAL1X2  [FIDUCIAL-1X2]  59.44,109.22 0 bottom
JP126  FIDUCIAL1X2  [FIDUCIAL-1X2]  83.19,85.47 0 bottom
JP127  STAND-OFF  [STAND-OFF]  87.12,107.44 0 top
JP128  STAND-OFF  [STAND-OFF]  107.44,107.44 0 top
JP129  FIDUCIAL1X2  [FIDUCIAL-1X2]  109.09,85.47 0 top
JP130  FIDUCIAL1X2  [FIDUCIAL-1X2]  85.34,109.22 0 top
JP131  FIDUCIAL1X2  [FIDUCIAL-1X2]  85.34,109.22 0 bottom
JP132  FIDUCIAL1X2  [FIDUCIAL-1X2]  109.09,85.47 0 bottom
JP133  STAND-OFF  [STAND-OFF]  113.03,107.44 0 top
JP134  STAND-OFF  [STAND-OFF]  133.35,107.44 0 top
JP135  FIDUCIAL1X2  [FIDUCIAL-1X2]  135,85.47 0 top
JP136  FIDUCIAL1X2  [FIDUCIAL-1X2]  111.25,109.22 0 top
JP137  FIDUCIAL1X2  [FIDUCIAL-1X2]  111.25,109.22 0 bottom
JP138  FIDUCIAL1X2  [FIDUCIAL-1X2]  135,85.47 0 bottom
JP139  STAND-OFF  [STAND-OFF]  138.94,107.44 0 top
JP140  STAND-OFF  [STAND-OFF]  159.26,107.44 0 top
JP141  FIDUCIAL1X2  [FIDUCIAL-1X2]  160.91,85.47 0 top
JP142  FIDUCIAL1X2  [FIDUCIAL-1X2]  137.16,109.22 0 top
JP143  FIDUCIAL1X2  [FIDUCIAL-1X2]  137.16,109.22 0 bottom
JP144  FIDUCIAL1X2  [FIDUCIAL-1X2]  160.91,85.47 0 bottom
JP145  STAND-OFF  [STAND-OFF]  9.4,133.35 0 top
JP146  STAND-OFF  [STAND-OFF]  29.72,133.35 0 top
JP147  FIDUCIAL1X2  [FIDUCIAL-1X2]  31.37,111.38 0 top
JP148  FIDUCIAL1X2  [FIDUCIAL-1X2]  7.62,135.13 0 top
JP149  FIDUCIAL1X2  [FIDUCIAL-1X2]  7.62,135.13 0 bottom
JP150  FIDUCIAL1X2  [FIDUCIAL-1X2]  31.37,111.38 0 bottom
JP151  STAND-OFF  [STAND-OFF]  35.31,133.35 0 top
JP152  STAND-OFF  [STAND-OFF]  55.63,133.35 0 top
JP153  FIDUCIAL1X2  [FIDUCIAL-1X2]  57.28,111.38 0 top
JP154  FIDUCIAL1X2  [FIDUCIAL-1X2]  33.53,135.13 0 top
JP155  FIDUCIAL1X2  [FIDUCIAL-1X2]  33.53,135.13 0 bottom
JP156  FIDUCIAL1X2  [FIDUCIAL-1X2]  57.28,111.38 0 bottom
JP157  STAND-OFF  [STAND-OFF]  61.21,133.35 0 top
JP158  STAND-OFF  [STAND-OFF]  81.53,133.35 0 top
JP159  FIDUCIAL1X2  [FIDUCIAL-1X2]  83.19,111.38 0 top
JP160  FIDUCIAL1X2  [FIDUCIAL-1X2]  59.44,135.13 0 top
JP161  FIDUCIAL1X2  [FIDUCIAL-1X2]  59.44,135.13 0 bottom
JP162  FIDUCIAL1X2  [FIDUCIAL-1X2]  83.19,111.38 0 bottom
JP163  STAND-OFF  [STAND-OFF]  87.12,133.35 0 top
JP164  STAND-OFF  [STAND-OFF]  107.44,133.35 0 top
JP165  FIDUCIAL1X2  [FIDUCIAL-1X2]  109.09,111.38 0 top
JP166  FIDUCIAL1X2  [FIDUCIAL-1X2]  85.34,135.13 0 top
JP167  FIDUCIAL1X2  [FIDUCIAL-1X2]  85.34,135.13 0 bottom
JP168  FIDUCIAL1X2  [FIDUCIAL-1X2]  109.09,111.38 0 bottom
JP169  STAND-OFF  [STAND-OFF]  113.03,133.35 0 top
JP170  STAND-OFF  [STAND-OFF]  133.35,133.35 0 top
JP171  FIDUCIAL1X2  [FIDUCIAL-1X2]  135,111.38 0 top
JP172  FIDUCIAL1X2  [FIDUCIAL-1X2]  111.25,135.13 0 top
JP173  FIDUCIAL1X2  [FIDUCIAL-1X2]  111.25,135.13 0 bottom
JP174  FIDUCIAL1X2  [FIDUCIAL-1X2]  135,111.38 0 bottom
JP175  STAND-OFF  [STAND-OFF]  138.94,133.35 0 top
JP176  STAND-OFF  [STAND-OFF]  159.26,133.35 0 top
JP177  FIDUCIAL1X2  [FIDUCIAL-1X2]  160.91,111.38 0 top
JP178  FIDUCIAL1X2  [FIDUCIAL-1X2]  137.16,135.13 0 top
JP179  FIDUCIAL1X2  [FIDUCIAL-1X2]  137.16,135.13 0 bottom
JP180  FIDUCIAL1X2  [FIDUCIAL-1X2]  160.91,111.38 0 bottom
JP181  STAND-OFF  [STAND-OFF]  9.4,159.26 0 top
JP182  STAND-OFF  [STAND-OFF]  29.72,159.26 0 top
JP183  FIDUCIAL1X2  [FIDUCIAL-1X2]  31.37,137.29 0 top
JP184  FIDUCIAL1X2  [FIDUCIAL-1X2]  7.62,161.04 0 top
JP185  FIDUCIAL1X2  [FIDUCIAL-1X2]  7.62,161.04 0 bottom
JP186  FIDUCIAL1X2  [FIDUCIAL-1X2]  31.37,137.29 0 bottom
JP187  STAND-OFF  [STAND-OFF]  35.31,159.26 0 top
JP188  STAND-OFF  [STAND-OFF]  55.63,159.26 0 top
JP189  FIDUCIAL1X2  [FIDUCIAL-1X2]  57.28,137.29 0 top
JP190  FIDUCIAL1X2  [FIDUCIAL-1X2]  33.53,161.04 0 top
JP191  FIDUCIAL1X2  [FIDUCIAL-1X2]  33.53,161.04 0 bottom
JP192  FIDUCIAL1X2  [FIDUCIAL-1X2]  57.28,137.29 0 bottom
JP193  STAND-OFF  [STAND-OFF]  61.21,159.26 0 top
JP194  STAND-OFF  [STAND-OFF]  81.53,159.26 0 top
JP195  FIDUCIAL1X2  [FIDUCIAL-1X2]  83.19,137.29 0 top
JP196  FIDUCIAL1X2  [FIDUCIAL-1X2]  59.44,161.04 0 top
JP197  FIDUCIAL1X2  [FIDUCIAL-1X2]  59.44,161.04 0 bottom
JP198  FIDUCIAL1X2  [FIDUCIAL-1X2]  83.19,137.29 0 bottom
JP199  STAND-OFF  [STAND-OFF]  87.12,159.26 0 top
JP200  STAND-OFF  [STAND-OFF]  107.44,159.26 0 top
JP201  FIDUCIAL1X2  [FIDUCIAL-1X2]  109.09,137.29 0 top
JP202  FIDUCIAL1X2  [FIDUCIAL-1X2]  85.34,161.04 0 top
JP203  FIDUCIAL1X2  [FIDUCIAL-1X2]  85.34,161.04 0 bottom
JP204  FIDUCIAL1X2  [FIDUCIAL-1X2]  109.09,137.29 0 bottom
JP205  STAND-OFF  [STAND-OFF]  113.03,159.26 0 top
JP206  STAND-OFF  [STAND-OFF]  133.35,159.26 0 top
JP207  FIDUCIAL1X2  [FIDUCIAL-1X2]  135,137.29 0 top
JP208  FIDUCIAL1X2  [FIDUCIAL-1X2]  111.25,161.04 0 top
JP209  FIDUCIAL1X2  [FIDUCIAL-1X2]  111.25,161.04 0 bottom
JP210  FIDUCIAL1X2  [FIDUCIAL-1X2]  135,137.29 0 bottom
JP211  STAND-OFF  [STAND-OFF]  138.94,159.26 0 top
JP212  STAND-OFF  [STAND-OFF]  159.26,159.26 0 top
JP213  FIDUCIAL1X2  [FIDUCIAL-1X2]  160.91,137.29 0 top
JP214  FIDUCIAL1X2  [FIDUCIAL-1X2]  137.16,161.04 0 top
JP215  FIDUCIAL1X2  [FIDUCIAL-1X2]  137.16,161.04 0 bottom
JP216  FIDUCIAL1X2  [FIDUCIAL-1X2]  160.91,137.29 0 bottom
LOGO1  OSHW-LOGOS  [OSHW-LOGO-S]  35.31,10.67 0 bottom
LOGO2  OSHW-LOGOS  [OSHW-LOGO-S]  61.21,10.67 0 bottom
LOGO3  OSHW-LOGOS  [OSHW-LOGO-S]  87.12,10.67 0 bottom
LOGO4  OSHW-LOGOS  [OSHW-LOGO-S]  113.03,10.67 0 bottom
LOGO5  OSHW-LOGOS  [OSHW-LOGO-S]  9.4,10.67 0 bottom
LOGO6  OSHW-LOGOS  [OSHW-LOGO-S]  138.94,10.67 0 bottom
LOGO7  OSHW-LOGOS  [OSHW-LOGO-S]  9.4,36.58 0 bottom
LOGO8  OSHW-LOGOS  [OSHW-LOGO-S]  35.31,36.58 0 bottom
LOGO9  OSHW-LOGOS  [OSHW-LOGO-S]  61.21,36.58 0 bottom
LOGO10  OSHW-LOGOS  [OSHW-LOGO-S]  87.12,36.58 0 bottom
LOGO11  OSHW-LOGOS  [OSHW-LOGO-S]  113.03,36.58 0 bottom
LOGO12  OSHW-LOGOS  [OSHW-LOGO-S]  138.94,36.58 0 bottom
LOGO13  OSHW-LOGOS  [OSHW-LOGO-S]  9.4,62.48 0 bottom
LOGO14  OSHW-LOGOS  [OSHW-LOGO-S]  35.31,62.48 0 bottom
LOGO15  OSHW-LOGOS  [OSHW-LOGO-S]  61.21,62.48 0 bottom
LOGO16  OSHW-LOGOS  [OSHW-LOGO-S]  87.12,62.48 0 bottom
LOGO17  OSHW-LOGOS  [OSHW-LOGO-S]  113.03,62.48 0 bottom
LOGO18  OSHW-LOGOS  [OSHW-LOGO-S]  138.94,62.48 0 bottom
LOGO19  OSHW-LOGOS  [OSHW-LOGO-S]  9.4,88.39 0 bottom
LOGO20  OSHW-LOGOS  [OSHW-LOGO-S]  35.31,88.39 0 bottom
LOGO21  OSHW-LOGOS  [OSHW-LOGO-S]  61.21,88.39 0 bottom
LOGO22  OSHW-LOGOS  [OSHW-LOGO-S]  87.12,88.39 0 bottom
LOGO23  OSHW-LOGOS  [OSHW-LOGO-S]  113.03,88.39 0 bottom
LOGO24  OSHW-LOGOS  [OSHW-LOGO-S]  138.94,88.39 0 bottom
LOGO25  OSHW-LOGOS  [OSHW-LOGO-S]  9.4,114.3 0 bottom
LOGO26  OSHW-LOGOS  [OSHW-LOGO-S]  35.31,114.3 0 bottom
LOGO27  OSHW-LOGOS  [OSHW-LOGO-S]  61.21,114.3 0 bottom
LOGO28  OSHW-LOGOS  [OSHW-LOGO-S]  87.12,114.3 0 bottom
LOGO29  OSHW-LOGOS  [OSHW-LOGO-S]  113.03,114.3 0 bottom
LOGO30  OSHW-LOGOS  [OSHW-LOGO-S]  138.94,114.3 0 bottom
LOGO31  OSHW-LOGOS  [OSHW-LOGO-S]  9.4,140.21 0 bottom
LOGO32  OSHW-LOGOS  [OSHW-LOGO-S]  35.31,140.21 0 bottom
LOGO33  OSHW-LOGOS  [OSHW-LOGO-S]  61.21,140.21 0 bottom
LOGO34  OSHW-LOGOS  [OSHW-LOGO-S]  87.12,140.21 0 bottom
LOGO35  OSHW-LOGOS  [OSHW-LOGO-S]  113.03,140.21 0 bottom
LOGO36  OSHW-LOGOS  [OSHW-LOGO-S]  138.94,140.21 0 bottom
PWR  JUMPER-SMT_2_NC_TRACE_SILK  [SMT-JUMPER_2_NC_TRACE_SILK]  10.03,9.52 0 top
PWR1  JUMPER-SMT_2_NC_TRACE_SILK  [SMT-JUMPER_2_NC_TRACE_SILK]  35.94,9.52 0 top
PWR2  JUMPER-SMT_2_NC_TRACE_SILK  [SMT-JUMPER_2_NC_TRACE_SILK]  61.85,9.52 0 top
PWR3  JUMPER-SMT_2_NC_TRACE_SILK  [SMT-JUMPER_2_NC_TRACE_SILK]  87.76,9.52 0 top
PWR4  JUMPER-SMT_2_NC_TRACE_SILK  [SMT-JUMPER_2_NC_TRACE_SILK]  113.67,9.52 0 top
PWR5  JUMPER-SMT_2_NC_TRACE_SILK  [SMT-JUMPER_2_NC_TRACE_SILK]  139.57,9.52 0 top
PWR6  JUMPER-SMT_2_NC_TRACE_SILK  [SMT-JUMPER_2_NC_TRACE_SILK]  10.03,35.43 0 top
PWR7  JUMPER-SMT_2_NC_TRACE_SILK  [SMT-JUMPER_2_NC_TRACE_SILK]  35.94,35.43 0 top
PWR8  JUMPER-SMT_2_NC_TRACE_SILK  [SMT-JUMPER_2_NC_TRACE_SILK]  61.85,35.43 0 top
PWR9  JUMPER-SMT_2_NC_TRACE_SILK  [SMT-JUMPER_2_NC_TRACE_SILK]  87.76,35.43 0 top
PWR10  JUMPER-SMT_2_NC_TRACE_SILK  [SMT-JUMPER_2_NC_TRACE_SILK]  113.67,35.43 0 top
PWR11  JUMPER-SMT_2_NC_TRACE_SILK  [SMT-JUMPER_2_NC_TRACE_SILK]  139.57,35.43 0 top
PWR12  JUMPER-SMT_2_NC_TRACE_SILK  [SMT-JUMPER_2_NC_TRACE_SILK]  10.03,61.34 0 top
PWR13  JUMPER-SMT_2_NC_TRACE_SILK  [SMT-JUMPER_2_NC_TRACE_SILK]  35.94,61.34 0 top
PWR14  JUMPER-SMT_2_NC_TRACE_SILK  [SMT-JUMPER_2_NC_TRACE_SILK]  61.85,61.34 0 top
PWR15  JUMPER-SMT_2_NC_TRACE_SILK  [SMT-JUMPER_2_NC_TRACE_SILK]  87.76,61.34 0 top
PWR16  JUMPER-SMT_2_NC_TRACE_SILK  [SMT-JUMPER_2_NC_TRACE_SILK]  113.67,61.34 0 top
PWR17  JUMPER-SMT_2_NC_TRACE_SILK  [SMT-JUMPER_2_NC_TRACE_SILK]  139.57,61.34 0 top
PWR18  JUMPER-SMT_2_NC_TRACE_SILK  [SMT-JUMPER_2_NC_TRACE_SILK]  10.03,87.25 0 top
PWR19  JUMPER-SMT_2_NC_TRACE_SILK  [SMT-JUMPER_2_NC_TRACE_SILK]  35.94,87.25 0 top
PWR20  JUMPER-SMT_2_NC_TRACE_SILK  [SMT-JUMPER_2_NC_TRACE_SILK]  61.85,87.25 0 top
PWR21  JUMPER-SMT_2_NC_TRACE_SILK  [SMT-JUMPER_2_NC_TRACE_SILK]  87.76,87.25 0 top
PWR22  JUMPER-SMT_2_NC_TRACE_SILK  [SMT-JUMPER_2_NC_TRACE_SILK]  113.67,87.25 0 top
PWR23  JUMPER-SMT_2_NC_TRACE_SILK  [SMT-JUMPER_2_NC_TRACE_SILK]  139.57,87.25 0 top
PWR24  JUMPER-SMT_2_NC_TRACE_SILK  [SMT-JUMPER_2_NC_TRACE_SILK]  10.03,113.16 0 top
PWR25  JUMPER-SMT_2_NC_TRACE_SILK  [SMT-JUMPER_2_NC_TRACE_SILK]  35.94,113.16 0 top
PWR26  JUMPER-SMT_2_NC_TRACE_SILK  [SMT-JUMPER_2_NC_TRACE_SILK]  61.85,113.16 0 top
PWR27  JUMPER-SMT_2_NC_TRACE_SILK  [SMT-JUMPER_2_NC_TRACE_SILK]  87.76,113.16 0 top
PWR28  JUMPER-SMT_2_NC_TRACE_SILK  [SMT-JUMPER_2_NC_TRACE_SILK]  113.67,113.16 0 top
PWR29  JUMPER-SMT_2_NC_TRACE_SILK  [SMT-JUMPER_2_NC_TRACE_SILK]  139.57,113.16 0 top
PWR30  JUMPER-SMT_2_NC_TRACE_SILK  [SMT-JUMPER_2_NC_TRACE_SILK]  10.03,139.06 0 top
PWR31  JUMPER-SMT_2_NC_TRACE_SILK  [SMT-JUMPER_2_NC_TRACE_SILK]  35.94,139.06 0 top
PWR32  JUMPER-SMT_2_NC_TRACE_SILK  [SMT-JUMPER_2_NC_TRACE_SILK]  61.85,139.06 0 top
PWR33  JUMPER-SMT_2_NC_TRACE_SILK  [SMT-JUMPER_2_NC_TRACE_SILK]  87.76,139.06 0 top
PWR34  JUMPER-SMT_2_NC_TRACE_SILK  [SMT-JUMPER_2_NC_TRACE_SILK]  113.67,139.06 0 top
PWR35  JUMPER-SMT_2_NC_TRACE_SILK  [SMT-JUMPER_2_NC_TRACE_SILK]  139.57,139.06 0 top
R1  10k  [0603]  16,22.61 90 top
R2  10k  [0603]  23.11,22.61 90 top
R3  1k  [0603]  10.03,11.56 180 top
R4  4.7  [0603]  15.11,20.07 0 top
R5  1k  [0603]  35.94,11.56 180 top
R6  10k  [0603]  41.91,22.61 90 top
R7  10k  [0603]  49.02,22.61 90 top
R8  4.7  [0603]  41.02,20.07 0 top
R9  1k  [0603]  61.85,11.56 180 top
R10  10k  [0603]  67.82,22.61 90 top
R11  10k  [0603]  74.93,22.61 90 top
R12  4.7  [0603]  66.93,20.07 0 top
R13  1k  [0603]  87.76,11.56 180 top
R14  10k  [0603]  93.73,22.61 90 top
R15  10k  [0603]  100.84,22.61 90 top
R16  4.7  [0603]  92.84,20.07 0 top
R17  1k  [0603]  113.67,11.56 180 top
R18  10k  [0603]  119.63,22.61 90 top
R19  10k  [0603]  126.75,22.61 90 top
R20  4.7  [0603]  118.75,20.07 0 top
R21  1k  [0603]  139.57,11.56 180 top
R22  10k  [0603]  145.54,22.61 90 top
R23  10k  [0603]  152.65,22.61 90 top
R24  4.7  [0603]  144.65,20.07 0 top
R25  1k  [0603]  10.03,37.46 180 top
R26  10k  [0603]  16,48.51 90 top
R27  10k  [0603]  23.11,48.51 90 top
R28  4.7  [0603]  15.11,45.97 0 top
R29  1k  [0603]  35.94,37.46 180 top
R30  10k  [0603]  41.91,48.51 90 top
R31  10k  [0603]  49.02,48.51 90 top
R32  4.7  [0603]  41.02,45.97 0 top
R33  1k  [0603]  61.85,37.46 180 top
R34  10k  [0603]  67.82,48.51 90 top
R35  10k  [0603]  74.93,48.51 90 top
R36  4.7  [0603]  66.93,45.97 0 top
R37  1k  [0603]  87.76,37.46 180 top
R38  10k  [0603]  93.73,48.51 90 top
R39  10k  [0603]  100.84,48.51 90 top
R40  4.7  [0603]  92.84,45.97 0 top
R41  1k  [0603]  113.67,37.46 180 top
R42  10k  [0603]  119.63,48.51 90 top
R43  10k  [0603]  126.75,48.51 90 top
R44  4.7  [0603]  118.75,45.97 0 top
R45  1k  [0603]  139.57,37.46 180 top
R46  10k  [0603]  145.54,48.51 90 top
R47  10k  [0603]  152.65,48.51 90 top
R48  4.7  [0603]  144.65,45.97 0 top
R49  1k  [0603]  10.03,63.37 180 top
R50  10k  [0603]  16,74.42 90 top
R51  10k  [0603]  23.11,74.42 90 top
R52  4.7  [0603]  15.11,71.88 0 top
R53  1k  [0603]  35.94,63.37 180 top
R54  10k  [0603]  41.91,74.42 90 top
R55  10k  [0603]  49.02,74.42 90 top
R56  4.7  [0603]  41.02,71.88 0 top
R57  1k  [0603]  61.85,63.37 180 top
R58  10k  [0603]  67.82,74.42 90 top
R59  10k  [0603]  74.93,74.42 90 top
R60  4.7  [0603]  66.93,71.88 0 top
R61  1k  [0603]  87.76,63.37 180 top
R62  10k  [0603]  93.73,74.42 90 top
R63  10k  [0603]  100.84,74.42 90 top
R64  4.7  [0603]  92.84,71.88 0 top
R65  1k  [0603]  113.67,63.37 180 top
R66  10k  [0603]  119.63,74.42 90 top
R67  10k  [0603]  126.75,74.42 90 top
R68  4.7  [0603]  118.75,71.88 0 top
R69  1k  [0603]  139.57,63.37 180 top
R70  10k  [0603]  145.54,74.42 90 top
R71  10k  [0603]  152.65,74.42 90 top
R72  4.7  [0603]  144.65,71.88 0 top
R73  1k  [0603]  10.03,89.28 180 top
R74  10k  [0603]  16,100.33 90 top
R75  10k  [0603]  23.11,100.33 90 top
R76  4.7  [0603]  15.11,97.79 0 top
R77  1k  [0603]  35.94,89.28 180 top
R78  10k  [0603]  41.91,100.33 90 top
R79  10k  [0603]  49.02,100.33 90 top
R80  4.7  [0603]  41.02,97.79 0 top
R81  1k  [0603]  61.85,89.28 180 top
R82  10k  [0603]  67.82,100.33 90 top
R83  10k  [0603]  74.93,100.33 90 top
R84  4.7  [0603]  66.93,97.79 0 top
R85  1k  [0603]  87.76,89.28 180 top
R86  10k  [0603]  93.73,100.33 90 top
R87  10k  [0603]  100.84,100.33 90 top
R88  4.7  [0603]  92.84,97.79 0 top
R89  1k  [0603]  113.67,89.28 180 top
R90  10k  [0603]  119.63,100.33 90 top
R91  10k  [0603]  126.75,100.33 90 top
R92  4.7  [0603]  118.75,97.79 0 top
R93  1k  [0603]  139.57,89.28 180 top
R94  10k  [0603]  145.54,100.33 90 top
R95  10k  [0603]  152.65,100.33 90 top
R96  4.7  [0603]  144.65,97.79 0 top
R97  1k  [0603]  10.03,115.19 180 top
R98  10k  [0603]  16,126.24 90 top
R99  10k  [0603]  23.11,126.24 90 top
R100  4.7  [0603]  15.11,123.7 0 top
R101  1k  [0603]  35.94,115.19 180 top
R102  10k  [0603]  41.91,126.24 90 top
R103  10k  [0603]  49.02,126.24 90 top
R104  4.7  [0603]  41.02,123.7 0 top
R105  1k  [0603]  61.85,115.19 180 top
R106  10k  [0603]  67.82,126.24 90 top
R107  10k  [0603]  74.93,126.24 90 top
R108  4.7  [0603]  66.93,123.7 0 top
R109  1k  [0603]  87.76,115.19 180 top
R110  10k  [0603]  93.73,126.24 90 top
R111  10k  [0603]  100.84,126.24 90 top
R112  4.7  [0603]  92.84,123.7 0 top
R113  1k  [0603]  113.67,115.19 180 top
R114  10k  [0603]  119.63,126.24 90 top
R115  10k  [0603]  126.75,126.24 90 top
R116  4.7  [0603]  118.75,123.7 0 top
R117  1k  [0603]  139.57,115.19 180 top
R118  10k  [0603]  145.54,126.24 90 top
R119  10k  [0603]  152.65,126.24 90 top
R120  4.7  [0603]  144.65,123.7 0 top
R121  1k  [0603]  10.03,141.1 180 top
R122  10k  [0603]  16,152.15 90 top
R123  10k  [0603]  23.11,152.15 90 top
R124  4.7  [0603]  15.11,149.61 0 top
R125  1k  [0603]  35.94,141.1 180 top
R126  10k  [0603]  41.91,152.15 90 top
R127  10k  [0603]  49.02,152.15 90 top
R128  4.7  [0603]  41.02,149.61 0 top
R129  1k  [0603]  61.85,141.1 180 top
R130  10k  [0603]  67.82,152.15 90 top
R131  10k  [0603]  74.93,152.15 90 top
R132  4.7  [0603]  66.93,149.61 0 top
R133  1k  [0603]  87.76,141.1 180 top
R134  10k  [0603]  93.73,152.15 90 top
R135  10k  [0603]  100.84,152.15 90 top
R136  4.7  [0603]  92.84,149.61 0 top
R137  1k  [0603]  113.67,141.1 180 top
R138  10k  [0603]  119.63,152.15 90 top
R139  10k  [0603]  126.75,152.15 90 top
R140  4.7  [0603]  118.75,149.61 0 top
R141  1k  [0603]  139.57,141.1 180 top
R142  10k  [0603]  145.54,152.15 90 top
R143  10k  [0603]  152.65,152.15 90 top
R144  4.7  [0603]  144.65,149.61 0 top
U1  SGP40  [SGP40]  19.56,19.56 0 top
U2  SGP40  [SGP40]  45.47,19.56 0 top
U3  SGP40  [SGP40]  71.37,19.56 0 top
U4  SGP40  [SGP40]  97.28,19.56 0 top
U5  SGP40  [SGP40]  123.19,19.56 0 top
U6  SGP40  [SGP40]  149.1,19.56 0 top
U7  SGP40  [SGP40]  19.56,45.47 0 top
U8  SGP40  [SGP40]  45.47,45.47 0 top
U9  SGP40  [SGP40]  71.37,45.47 0 top
U10  SGP40  [SGP40]  97.28,45.47 0 top
U11  SGP40  [SGP40]  123.19,45.47 0 top
U12  SGP40  [SGP40]  149.1,45.47 0 top
U13  SGP40  [SGP40]  19.56,71.37 0 top
U14  SGP40  [SGP40]  45.47,71.37 0 top
U15  SGP40  [SGP40]  71.37,71.37 0 top
U16  SGP40  [SGP40]  97.28,71.37 0 top
U17  SGP40  [SGP40]  123.19,71.37 0 top
U18  SGP40  [SGP40]  149.1,71.37 0 top
U19  SGP40  [SGP40]  19.56,97.28 0 top
U20  SGP40  [SGP40]  45.47,97.28 0 top
U21  SGP40  [SGP40]  71.37,97.28 0 top
U22  SGP40  [SGP40]  97.28,97.28 0 top
U23  SGP40  [SGP40]  123.19,97.28 0 top
U24  SGP40  [SGP40]  149.1,97.28 0 top
U25  SGP40  [SGP40]  19.56,123.19 0 top
U26  SGP40  [SGP40]  45.47,123.19 0 top
U27  SGP40  [SGP40]  71.37,123.19 0 top
U28  SGP40  [SGP40]  97.28,123.19 0 top
U29  SGP40  [SGP40]  123.19,123.19 0 top
U30  SGP40  [SGP40]  149.1,123.19 0 top
U31  SGP40  [SGP40]  19.56,149.1 0 top
U32  SGP40  [SGP40]  45.47,149.1 0 top
U33  SGP40  [SGP40]  71.37,149.1 0 top
U34  SGP40  [SGP40]  97.28,149.1 0 top
U35  SGP40  [SGP40]  123.19,149.1 0 top
U36  SGP40  [SGP40]  149.1,149.1 0 top
U$1  [#GND#0]  15.75,10.92 90 bottom
U$2  [#3#3V#0]  18.29,11.05 90 bottom
U$3  [#SDA#0]  20.83,10.92 90 bottom
U$4  [#SCL#0]  23.37,10.79 90 bottom
U$5  [I2C]  47.37,22.73 0 bottom
U$6  [QWIIC_5MM]  55.12,24.26 0 top
U$7  SPARKX-LOGO3  [SPARKX-SMALL]  45.47,29.72 0 top
U$8  SPARKX-LOGO3  [SPARKX-SMALL]  45.47,29.72 0 bottom
U$9  [SGP400]  53.85,13.21 0 top
U$10  SPARKX-LOGO3  [SPARKX-SMALL]  19.56,29.72 0 top
U$11  [SGP400]  54.61,13.21 0 bottom
U$12  [AIR0]  52.45,11.94 0 top
U$13  [AIR0]  55.88,11.94 0 bottom
U$14  [QUALITY0]  54.1,10.67 0 top
U$15  [I2C]  21.46,22.73 0 bottom
U$16  [QWIIC_5MM]  29.21,24.26 0 top
U$17  [QUALITY0]  54.23,10.67 0 bottom
U$18  SPARKX-LOGO3  [SPARKX-SMALL]  19.56,29.72 0 bottom
U$19  [SGP400]  27.94,13.21 0 top
U$20  [SGP400]  28.7,13.21 0 bottom
U$21  [SENSOR0]  53.97,9.4 0 top
U$22  [SENSOR0]  54.48,9.4 0 bottom
U$23  [AIR0]  26.54,11.94 0 top
U$24  [AIR0]  29.97,11.94 0 bottom
U$25  [QUALITY0]  28.19,10.67 0 top
U$26  [ADR#_0X590]  45.47,17.02 0 bottom
U$27  [#PWR#0]  35.94,14.86 0 top
U$28  [QUALITY0]  28.32,10.67 0 bottom
U$29  [SENSOR0]  28.07,9.4 0 top
U$30  [SENSOR0]  28.57,9.4 0 bottom
U$31  [ADR#_0X590]  19.56,17.02 0 bottom
U$32  [#PWR#0]  10.03,14.86 0 top
U$33  [#GND#0]  15.75,10.92 90 top
U$34  [#3#3V#0]  18.29,11.05 90 top
U$35  [#SDA#0]  20.83,10.92 90 top
U$36  [#SCL#0]  23.37,10.79 90 top
U$37  [#GND#0]  41.66,10.92 90 top
U$38  [#3#3V#0]  44.2,11.05 90 top
U$39  [#SDA#0]  46.74,10.92 90 top
U$40  [#SCL#0]  49.28,10.79 90 top
U$41  [#GND#0]  41.66,10.92 90 bottom
U$42  [#3#3V#0]  44.2,11.05 90 bottom
U$43  [#SDA#0]  46.74,10.92 90 bottom
U$44  [#SCL#0]  49.28,10.79 90 bottom
U$45  [I2C]  73.28,22.73 0 bottom
U$46  [QWIIC_5MM]  81.03,24.26 0 top
U$47  SPARKX-LOGO3  [SPARKX-SMALL]  71.37,29.72 0 top
U$48  SPARKX-LOGO3  [SPARKX-SMALL]  71.37,29.72 0 bottom
U$49  [SGP400]  79.76,13.21 0 top
U$50  [SGP400]  80.52,13.21 0 bottom
U$51  [AIR0]  78.36,11.94 0 top
U$52  [AIR0]  81.79,11.94 0 bottom
U$53  [QUALITY0]  80.01,10.67 0 top
U$54  [QUALITY0]  80.14,10.67 0 bottom
U$55  [SENSOR0]  79.88,9.4 0 top
U$56  [SENSOR0]  80.39,9.4 0 bottom
U$57  [ADR#_0X590]  71.37,17.02 0 bottom
U$58  [#PWR#0]  61.85,14.86 0 top
U$59  [#GND#0]  67.56,10.92 90 top
U$60  [#3#3V#0]  70.1,11.05 90 top
U$61  [#SDA#0]  72.64,10.92 90 top
U$62  [#SCL#0]  75.18,10.79 90 top
U$63  [#GND#0]  67.56,10.92 90 bottom
U$64  [#3#3V#0]  70.1,11.05 90 bottom
U$65  [#SDA#0]  72.64,10.92 90 bottom
U$66  [#SCL#0]  75.18,10.79 90 bottom
U$67  [I2C]  99.19,22.73 0 bottom
U$68  [QWIIC_5MM]  106.93,24.26 0 top
U$69  SPARKX-LOGO3  [SPARKX-SMALL]  97.28,29.72 0 top
U$70  SPARKX-LOGO3  [SPARKX-SMALL]  97.28,29.72 0 bottom
U$71  [SGP400]  105.66,13.21 0 top
U$72  [SGP400]  106.43,13.21 0 bottom
U$73  [AIR0]  104.27,11.94 0 top
U$74  [AIR0]  107.7,11.94 0 bottom
U$75  [QUALITY0]  105.92,10.67 0 top
U$76  [QUALITY0]  106.05,10.67 0 bottom
U$77  [SENSOR0]  105.79,9.4 0 top
U$78  [SENSOR0]  106.3,9.4 0 bottom
U$79  [ADR#_0X590]  97.28,17.02 0 bottom
U$80  [#PWR#0]  87.76,14.86 0 top
U$81  [#GND#0]  93.47,10.92 90 top
U$82  [#3#3V#0]  96.01,11.05 90 top
U$83  [#SDA#0]  98.55,10.92 90 top
U$84  [#SCL#0]  101.09,10.79 90 top
U$85  [#GND#0]  93.47,10.92 90 bottom
U$86  [#3#3V#0]  96.01,11.05 90 bottom
U$87  [#SDA#0]  98.55,10.92 90 bottom
U$88  [#SCL#0]  101.09,10.79 90 bottom
U$89  [I2C]  125.09,22.73 0 bottom
U$90  [QWIIC_5MM]  132.84,24.26 0 top
U$91  SPARKX-LOGO3  [SPARKX-SMALL]  123.19,29.72 0 top
U$92  SPARKX-LOGO3  [SPARKX-SMALL]  123.19,29.72 0 bottom
U$93  [SGP400]  131.57,13.21 0 top
U$94  [SGP400]  132.33,13.21 0 bottom
U$95  [AIR0]  130.17,11.94 0 top
U$96  [AIR0]  133.6,11.94 0 bottom
U$97  [QUALITY0]  131.83,10.67 0 top
U$98  [QUALITY0]  131.95,10.67 0 bottom
U$99  [SENSOR0]  131.7,9.4 0 top
U$100  [SENSOR0]  132.21,9.4 0 bottom
U$101  [ADR#_0X590]  123.19,17.02 0 bottom
U$102  [#PWR#0]  113.67,14.86 0 top
U$103  [#GND#0]  119.38,10.92 90 top
U$104  [#3#3V#0]  121.92,11.05 90 top
U$105  [#SDA#0]  124.46,10.92 90 top
U$106  [#SCL#0]  127,10.79 90 top
U$107  [#GND#0]  119.38,10.92 90 bottom
U$108  [#3#3V#0]  121.92,11.05 90 bottom
U$109  [#SDA#0]  124.46,10.92 90 bottom
U$110  [#SCL#0]  127,10.79 90 bottom
U$111  [I2C]  151,22.73 0 bottom
U$112  [QWIIC_5MM]  158.75,24.26 0 top
U$113  SPARKX-LOGO3  [SPARKX-SMALL]  149.1,29.72 0 top
U$114  SPARKX-LOGO3  [SPARKX-SMALL]  149.1,29.72 0 bottom
U$115  [SGP400]  157.48,13.21 0 top
U$116  [SGP400]  158.24,13.21 0 bottom
U$117  [AIR0]  156.08,11.94 0 top
U$118  [AIR0]  159.51,11.94 0 bottom
U$119  [QUALITY0]  157.73,10.67 0 top
U$120  [QUALITY0]  157.86,10.67 0 bottom
U$121  [SENSOR0]  157.61,9.4 0 top
U$122  [SENSOR0]  158.12,9.4 0 bottom
U$123  [ADR#_0X590]  149.1,17.02 0 bottom
U$124  [#PWR#0]  139.57,14.86 0 top
U$125  [#GND#0]  145.29,10.92 90 top
U$126  [#3#3V#0]  147.83,11.05 90 top
U$127  [#SDA#0]  150.37,10.92 90 top
U$128  [#SCL#0]  152.91,10.79 90 top
U$129  [#GND#0]  145.29,10.92 90 bottom
U$130  [#3#3V#0]  147.83,11.05 90 bottom
U$131  [#SDA#0]  150.37,10.92 90 bottom
U$132  [#SCL#0]  152.91,10.79 90 bottom
U$133  [I2C]  21.46,48.64 0 bottom
U$134  [QWIIC_5MM]  29.21,50.16 0 top
U$135  SPARKX-LOGO3  [SPARKX-SMALL]  19.56,55.63 0 top
U$136  SPARKX-LOGO3  [SPARKX-SMALL]  19.56,55.63 0 bottom
U$137  [SGP400]  27.94,39.12 0 top
U$138  [SGP400]  28.7,39.12 0 bottom
U$139  [AIR0]  26.54,37.85 0 top
U$140  [AIR0]  29.97,37.85 0 bottom
U$141  [QUALITY0]  28.19,36.58 0 top
U$142  [QUALITY0]  28.32,36.58 0 bottom
U$143  [SENSOR0]  28.07,35.31 0 top
U$144  [SENSOR0]  28.57,35.31 0 bottom
U$145  [ADR#_0X590]  19.56,42.93 0 bottom
U$146  [#PWR#0]  10.03,40.77 0 top
U$147  [#GND#0]  15.75,36.83 90 top
U$148  [#3#3V#0]  18.29,36.96 90 top
U$149  [#SDA#0]  20.83,36.83 90 top
U$150  [#SCL#0]  23.37,36.7 90 top
U$151  [#GND#0]  15.75,36.83 90 bottom
U$152  [#3#3V#0]  18.29,36.96 90 bottom
U$153  [#SDA#0]  20.83,36.83 90 bottom
U$154  [#SCL#0]  23.37,36.7 90 bottom
U$155  [I2C]  47.37,48.64 0 bottom
U$156  [QWIIC_5MM]  55.12,50.16 0 top
U$157  SPARKX-LOGO3  [SPARKX-SMALL]  45.47,55.63 0 top
U$158  SPARKX-LOGO3  [SPARKX-SMALL]  45.47,55.63 0 bottom
U$159  [SGP400]  53.85,39.12 0 top
U$160  [SGP400]  54.61,39.12 0 bottom
U$161  [AIR0]  52.45,37.85 0 top
U$162  [AIR0]  55.88,37.85 0 bottom
U$163  [QUALITY0]  54.1,36.58 0 top
U$164  [QUALITY0]  54.23,36.58 0 bottom
U$165  [SENSOR0]  53.97,35.31 0 top
U$166  [SENSOR0]  54.48,35.31 0 bottom
U$167  [ADR#_0X590]  45.47,42.93 0 bottom
U$168  [#PWR#0]  35.94,40.77 0 top
U$169  [#GND#0]  41.66,36.83 90 top
U$170  [#3#3V#0]  44.2,36.96 90 top
U$171  [#SDA#0]  46.74,36.83 90 top
U$172  [#SCL#0]  49.28,36.7 90 top
U$173  [#GND#0]  41.66,36.83 90 bottom
U$174  [#3#3V#0]  44.2,36.96 90 bottom
U$175  [#SDA#0]  46.74,36.83 90 bottom
U$176  [#SCL#0]  49.28,36.7 90 bottom
U$177  [I2C]  73.28,48.64 0 bottom
U$178  [QWIIC_5MM]  81.03,50.16 0 top
U$179  SPARKX-LOGO3  [SPARKX-SMALL]  71.37,55.63 0 top
U$180  SPARKX-LOGO3  [SPARKX-SMALL]  71.37,55.63 0 bottom
U$181  [SGP400]  79.76,39.12 0 top
U$182  [SGP400]  80.52,39.12 0 bottom
U$183  [AIR0]  78.36,37.85 0 top
U$184  [AIR0]  81.79,37.85 0 bottom
U$185  [QUALITY0]  80.01,36.58 0 top
U$186  [QUALITY0]  80.14,36.58 0 bottom
U$187  [SENSOR0]  79.88,35.31 0 top
U$188  [SENSOR0]  80.39,35.31 0 bottom
U$189  [ADR#_0X590]  71.37,42.93 0 bottom
U$190  [#PWR#0]  61.85,40.77 0 top
U$191  [#GND#0]  67.56,36.83 90 top
U$192  [#3#3V#0]  70.1,36.96 90 top
U$193  [#SDA#0]  72.64,36.83 90 top
U$194  [#SCL#0]  75.18,36.7 90 top
U$195  [#GND#0]  67.56,36.83 90 bottom
U$196  [#3#3V#0]  70.1,36.96 90 bottom
U$197  [#SDA#0]  72.64,36.83 90 bottom
U$198  [#SCL#0]  75.18,36.7 90 bottom
U$199  [I2C]  99.19,48.64 0 bottom
U$200  [QWIIC_5MM]  106.93,50.16 0 top
U$201  SPARKX-LOGO3  [SPARKX-SMALL]  97.28,55.63 0 top
U$202  SPARKX-LOGO3  [SPARKX-SMALL]  97.28,55.63 0 bottom
U$203  [SGP400]  105.66,39.12 0 top
U$204  [SGP400]  106.43,39.12 0 bottom
U$205  [AIR0]  104.27,37.85 0 top
U$206  [AIR0]  107.7,37.85 0 bottom
U$207  [QUALITY0]  105.92,36.58 0 top
U$208  [QUALITY0]  106.05,36.58 0 bottom
U$209  [SENSOR0]  105.79,35.31 0 top
U$210  [SENSOR0]  106.3,35.31 0 bottom
U$211  [ADR#_0X590]  97.28,42.93 0 bottom
U$212  [#PWR#0]  87.76,40.77 0 top
U$213  [#GND#0]  93.47,36.83 90 top
U$214  [#3#3V#0]  96.01,36.96 90 top
U$215  [#SDA#0]  98.55,36.83 90 top
U$216  [#SCL#0]  101.09,36.7 90 top
U$217  [#GND#0]  93.47,36.83 90 bottom
U$218  [#3#3V#0]  96.01,36.96 90 bottom
U$219  [#SDA#0]  98.55,36.83 90 bottom
U$220  [#SCL#0]  101.09,36.7 90 bottom
U$221  [I2C]  125.09,48.64 0 bottom
U$222  [QWIIC_5MM]  132.84,50.16 0 top
U$223  SPARKX-LOGO3  [SPARKX-SMALL]  123.19,55.63 0 top
U$224  SPARKX-LOGO3  [SPARKX-SMALL]  123.19,55.63 0 bottom
U$225  [SGP400]  131.57,39.12 0 top
U$226  [SGP400]  132.33,39.12 0 bottom
U$227  [AIR0]  130.17,37.85 0 top
U$228  [AIR0]  133.6,37.85 0 bottom
U$229  [QUALITY0]  131.83,36.58 0 top
U$230  [QUALITY0]  131.95,36.58 0 bottom
U$231  [SENSOR0]  131.7,35.31 0 top
U$232  [SENSOR0]  132.21,35.31 0 bottom
U$233  [ADR#_0X590]  123.19,42.93 0 bottom
U$234  [#PWR#0]  113.67,40.77 0 top
U$235  [#GND#0]  119.38,36.83 90 top
U$236  [#3#3V#0]  121.92,36.96 90 top
U$237  [#SDA#0]  124.46,36.83 90 top
U$238  [#SCL#0]  127,36.7 90 top
U$239  [#GND#0]  119.38,36.83 90 bottom
U$240  [#3#3V#0]  121.92,36.96 90 bottom
U$241  [#SDA#0]  124.46,36.83 90 bottom
U$242  [#SCL#0]  127,36.7 90 bottom
U$243  [I2C]  151,48.64 0 bottom
U$244  [QWIIC_5MM]  158.75,50.16 0 top
U$245  SPARKX-LOGO3  [SPARKX-SMALL]  149.1,55.63 0 top
U$246  SPARKX-LOGO3  [SPARKX-SMALL]  149.1,55.63 0 bottom
U$247  [SGP400]  157.48,39.12 0 top
U$248  [SGP400]  158.24,39.12 0 bottom
U$249  [AIR0]  156.08,37.85 0 top
U$250  [AIR0]  159.51,37.85 0 bottom
U$251  [QUALITY0]  157.73,36.58 0 top
U$252  [QUALITY0]  157.86,36.58 0 bottom
U$253  [SENSOR0]  157.61,35.31 0 top
U$254  [SENSOR0]  158.12,35.31 0 bottom
U$255  [ADR#_0X590]  149.1,42.93 0 bottom
U$256  [#PWR#0]  139.57,40.77 0 top
U$257  [#GND#0]  145.29,36.83 90 top
U$258  [#3#3V#0]  147.83,36.96 90 top
U$259  [#SDA#0]  150.37,36.83 90 top
U$260  [#SCL#0]  152.91,36.7 90 top
U$261  [#GND#0]  145.29,36.83 90 bottom
U$262  [#3#3V#0]  147.83,36.96 90 bottom
U$263  [#SDA#0]  150.37,36.83 90 bottom
U$264  [#SCL#0]  152.91,36.7 90 bottom
U$265  [I2C]  21.46,74.55 0 bottom
U$266  [QWIIC_5MM]  29.21,76.07 0 top
U$267  SPARKX-LOGO3  [SPARKX-SMALL]  19.56,81.53 0 top
U$268  SPARKX-LOGO3  [SPARKX-SMALL]  19.56,81.53 0 bottom
U$269  [SGP400]  27.94,65.02 0 top
U$270  [SGP400]  28.7,65.02 0 bottom
U$271  [AIR0]  26.54,63.75 0 top
U$272  [AIR0]  29.97,63.75 0 bottom
U$273  [QUALITY0]  28.19,62.48 0 top
U$274  [QUALITY0]  28.32,62.48 0 bottom
U$275  [SENSOR0]  28.07,61.21 0 top
U$276  [SENSOR0]  28.57,61.21 0 bottom
U$277  [ADR#_0X590]  19.56,68.83 0 bottom
U$278  [#PWR#0]  10.03,66.67 0 top
U$279  [#GND#0]  15.75,62.74 90 top
U$280  [#3#3V#0]  18.29,62.86 90 top
U$281  [#SDA#0]  20.83,62.74 90 top
U$282  [#SCL#0]  23.37,62.61 90 top
U$283  [#GND#0]  15.75,62.74 90 bottom
U$284  [#3#3V#0]  18.29,62.86 90 bottom
U$285  [#SDA#0]  20.83,62.74 90 bottom
U$286  [#SCL#0]  23.37,62.61 90 bottom